# Altium PCB pcb_take2-1.PcbDoc (part 1 of 2)
Units mm, origin at the board's own origin, x right, y up, seen from the top; angles counter-clockwise.
Board outline 120 x 150 mm, 8 copper layers (Top Layer, Power plane, Mid-Layer 1, Mid-Layer 2, Mid-Layer 3, MidLayer4, GND plane, Bottom Layer); 174 components, 191 nets, 1036 pads, 8 vias.
Unrouted connection lines stored in the file: 235.
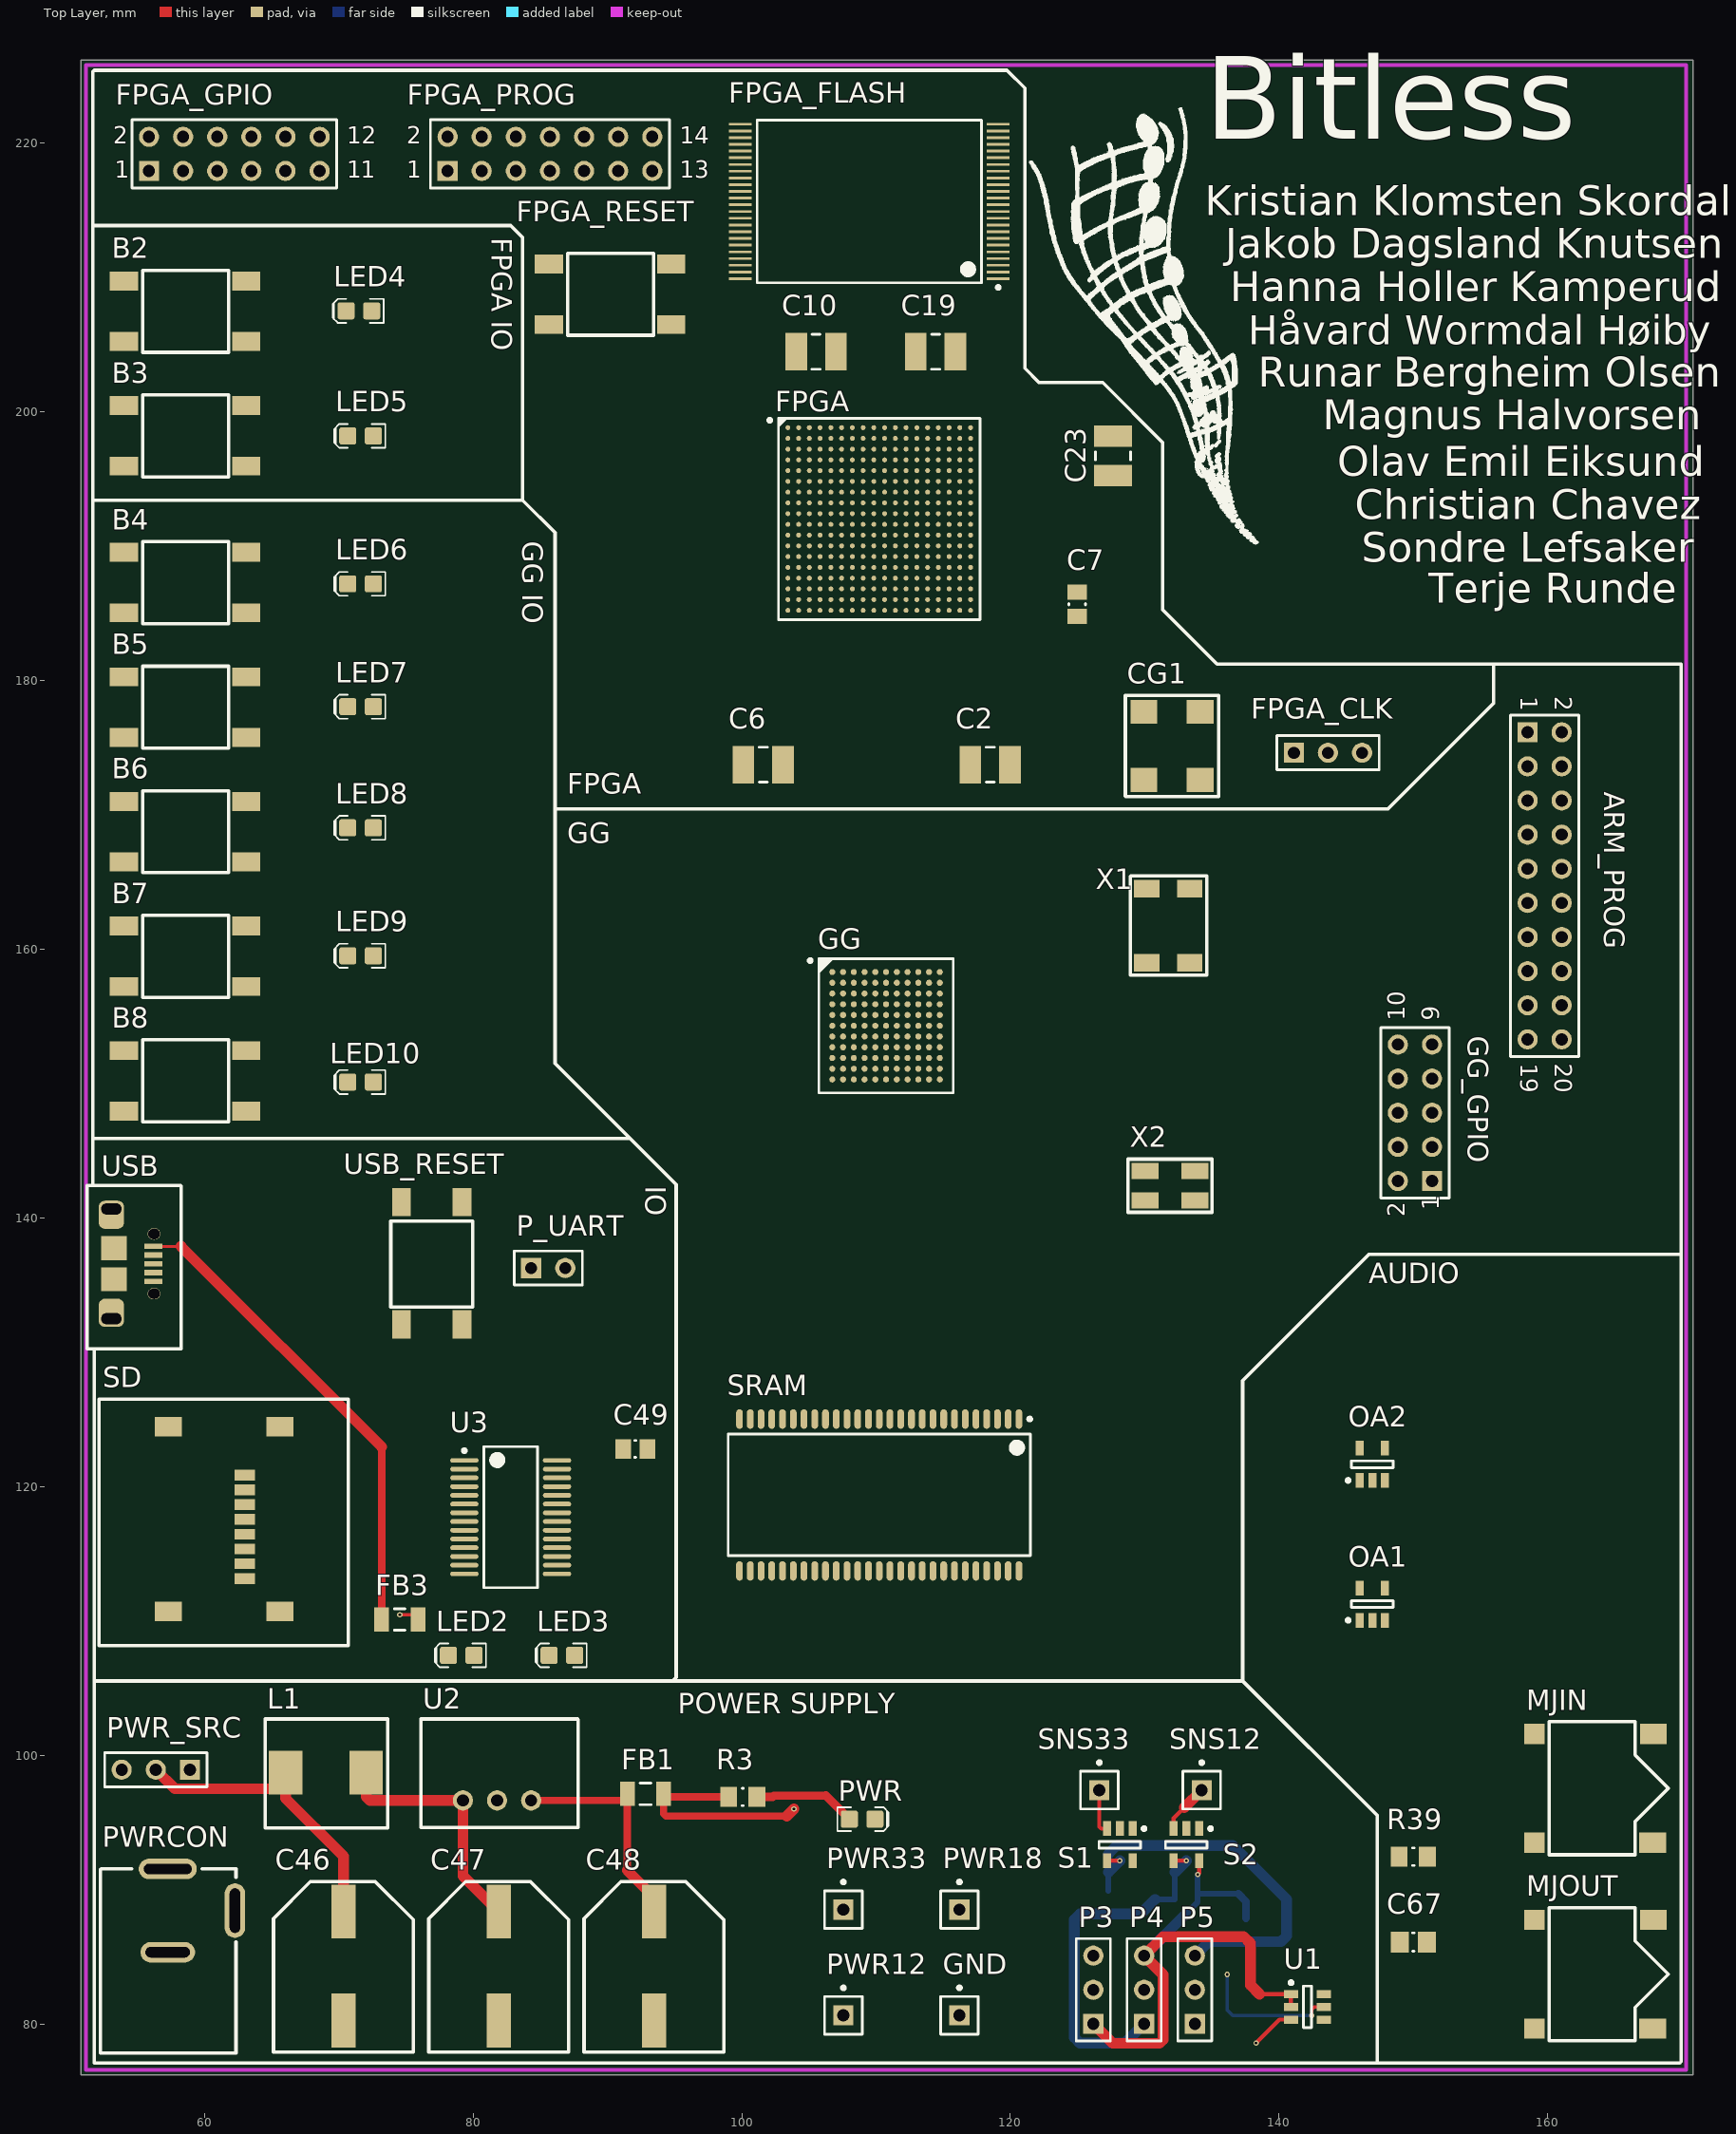
[diagram p0: Top Layer view]
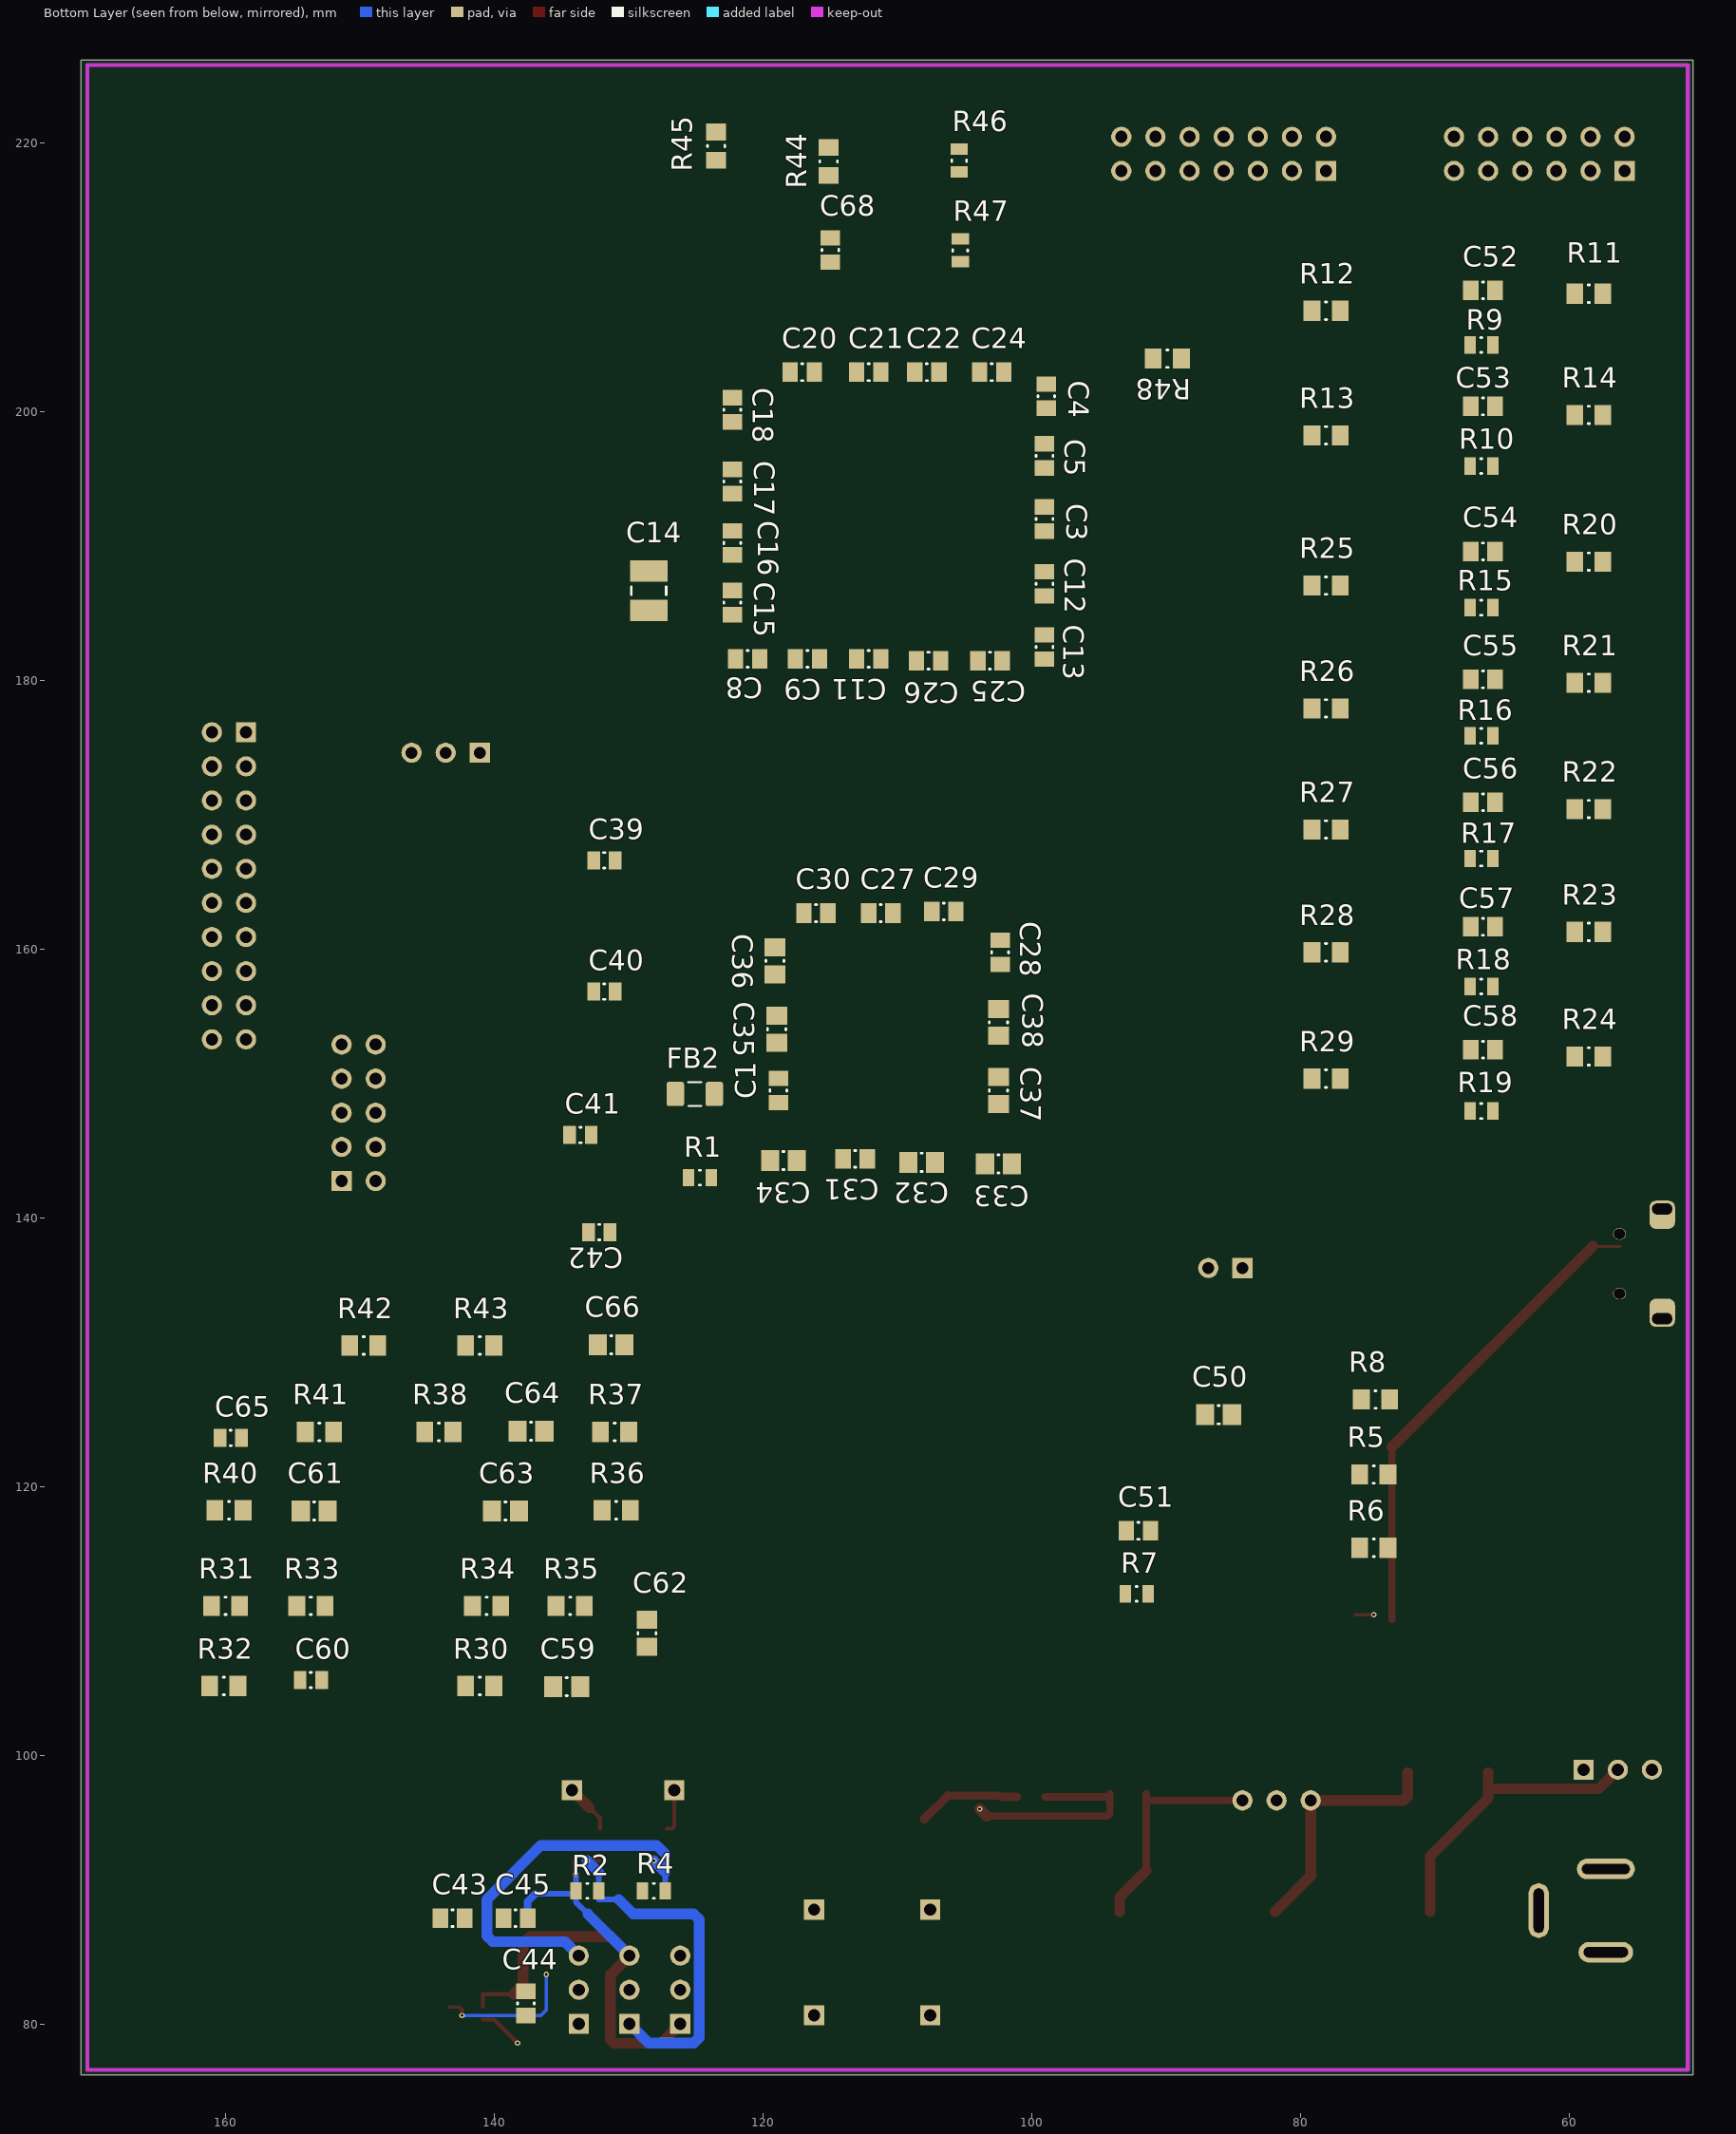
[diagram p1: Bottom Layer view, seen from below]
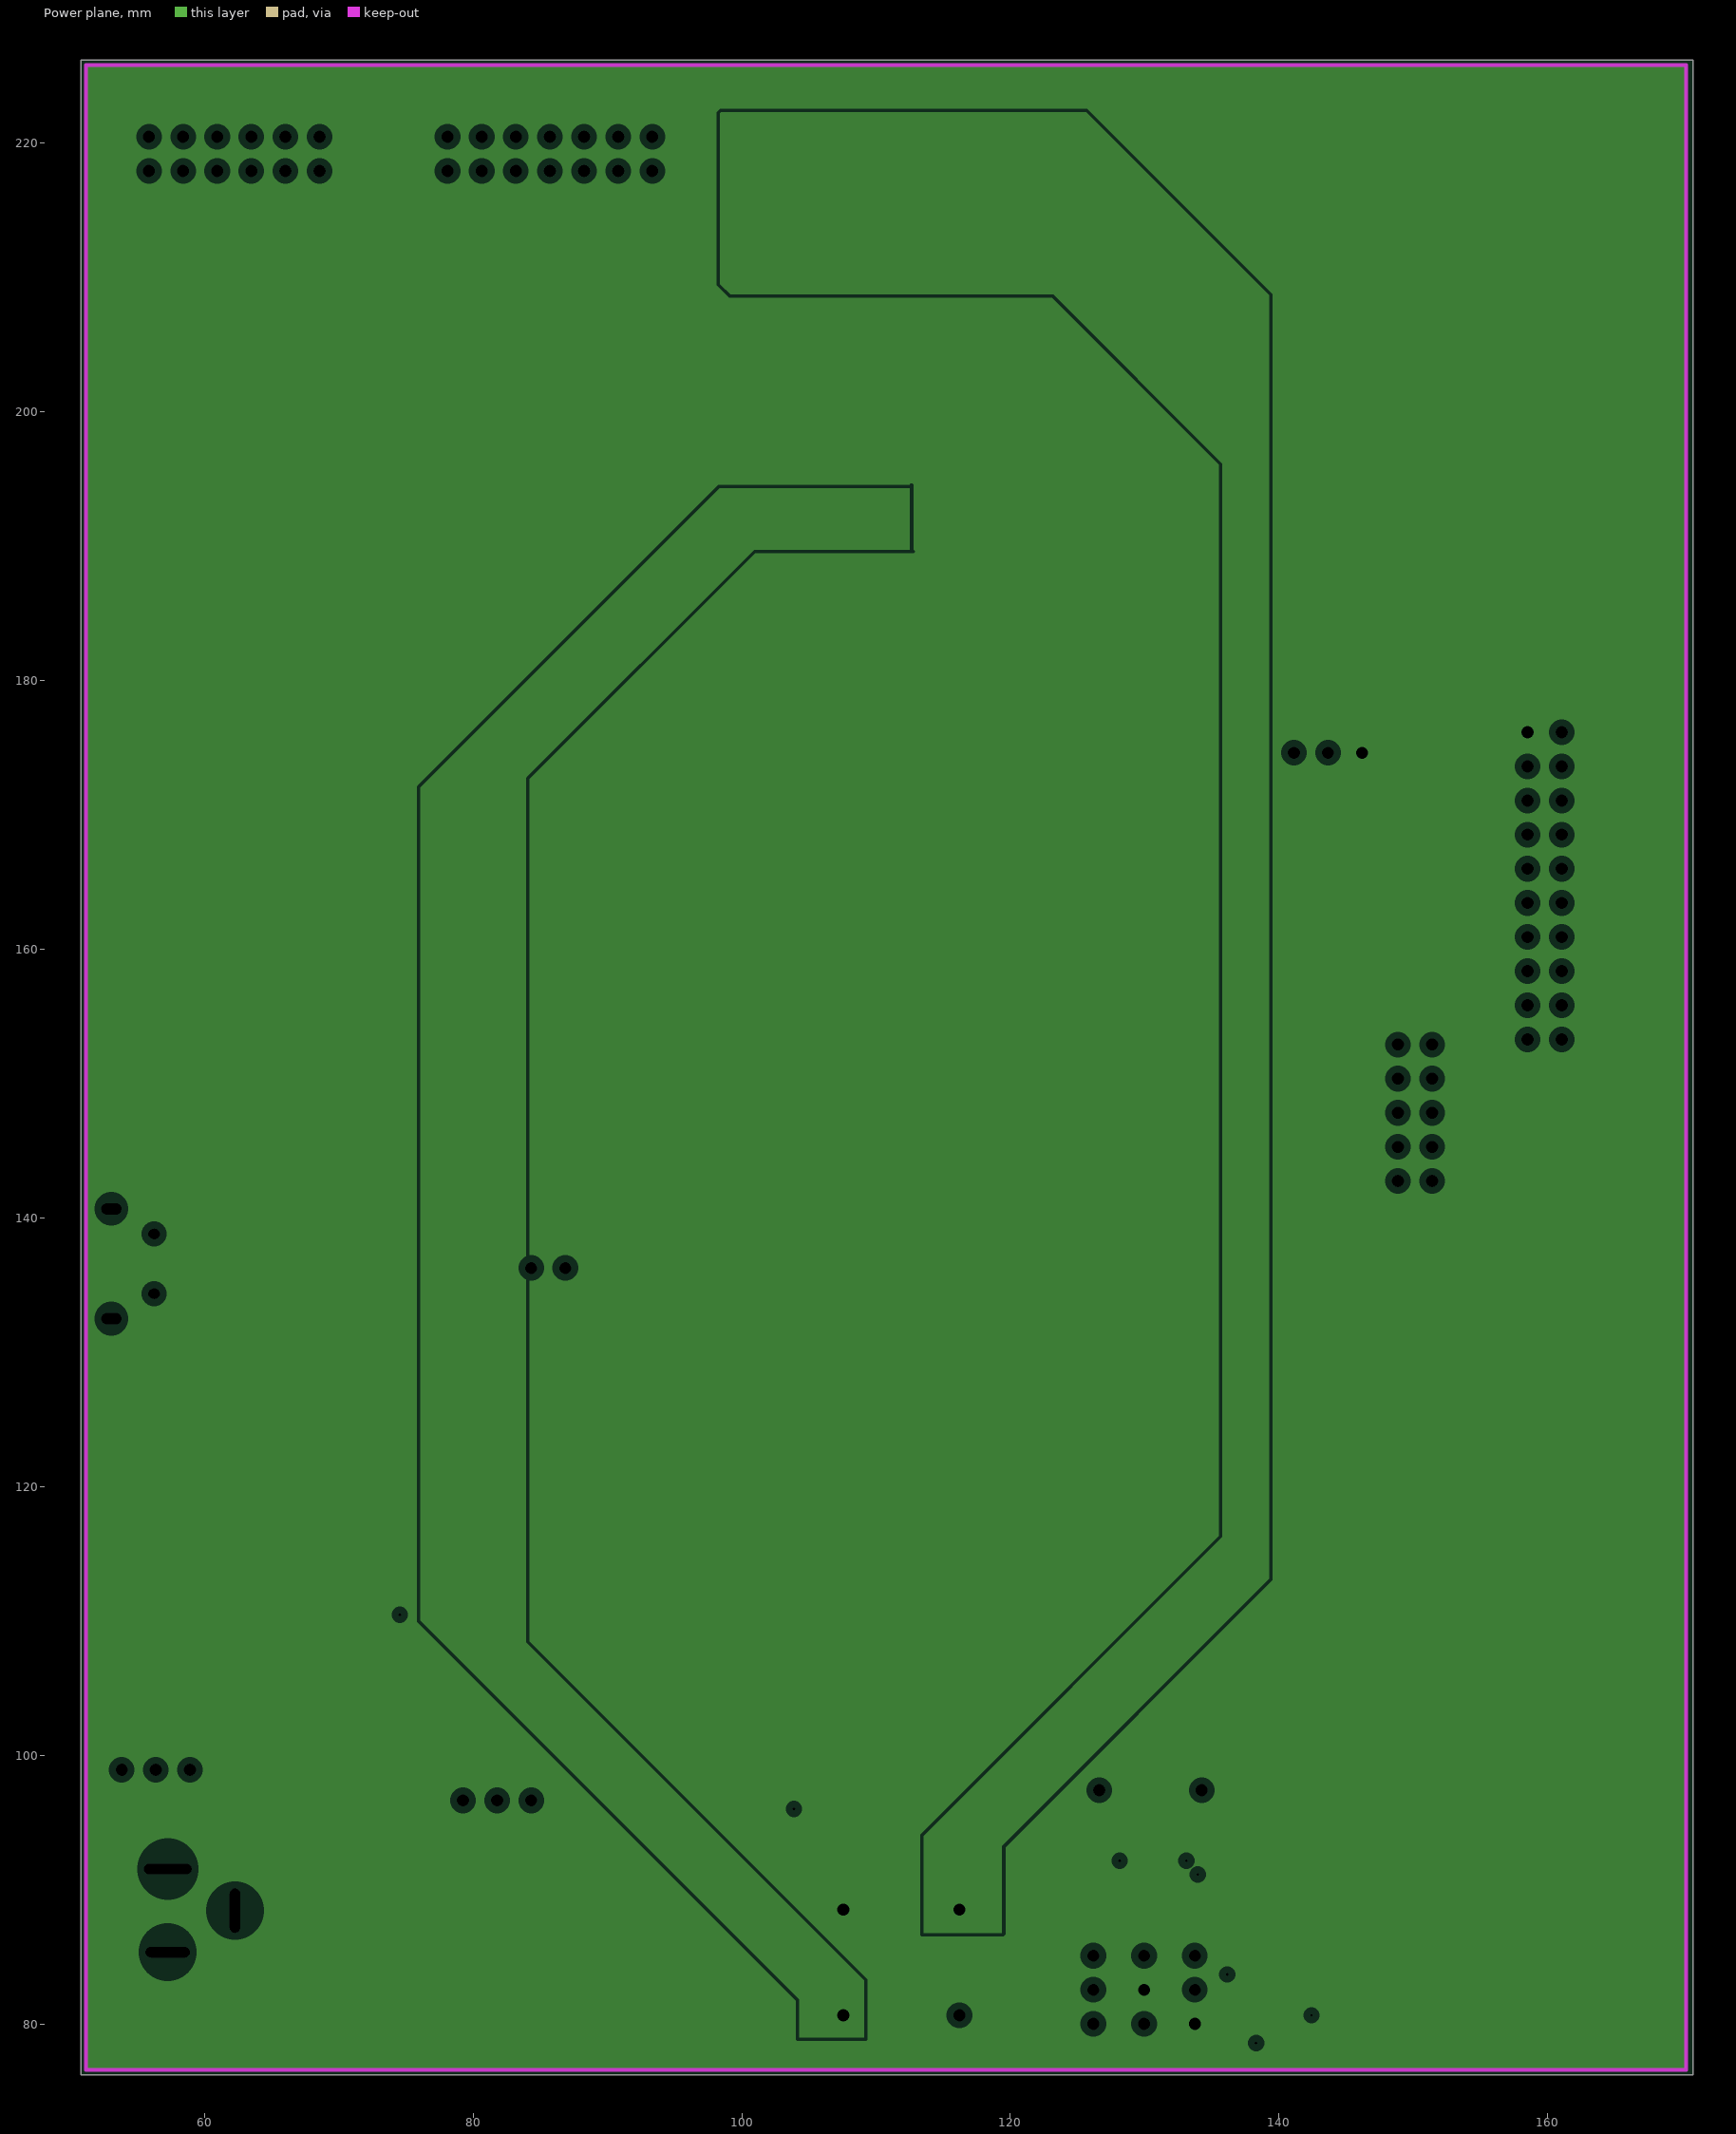
[diagram p2: Power plane, clearances drawn from the general rule]
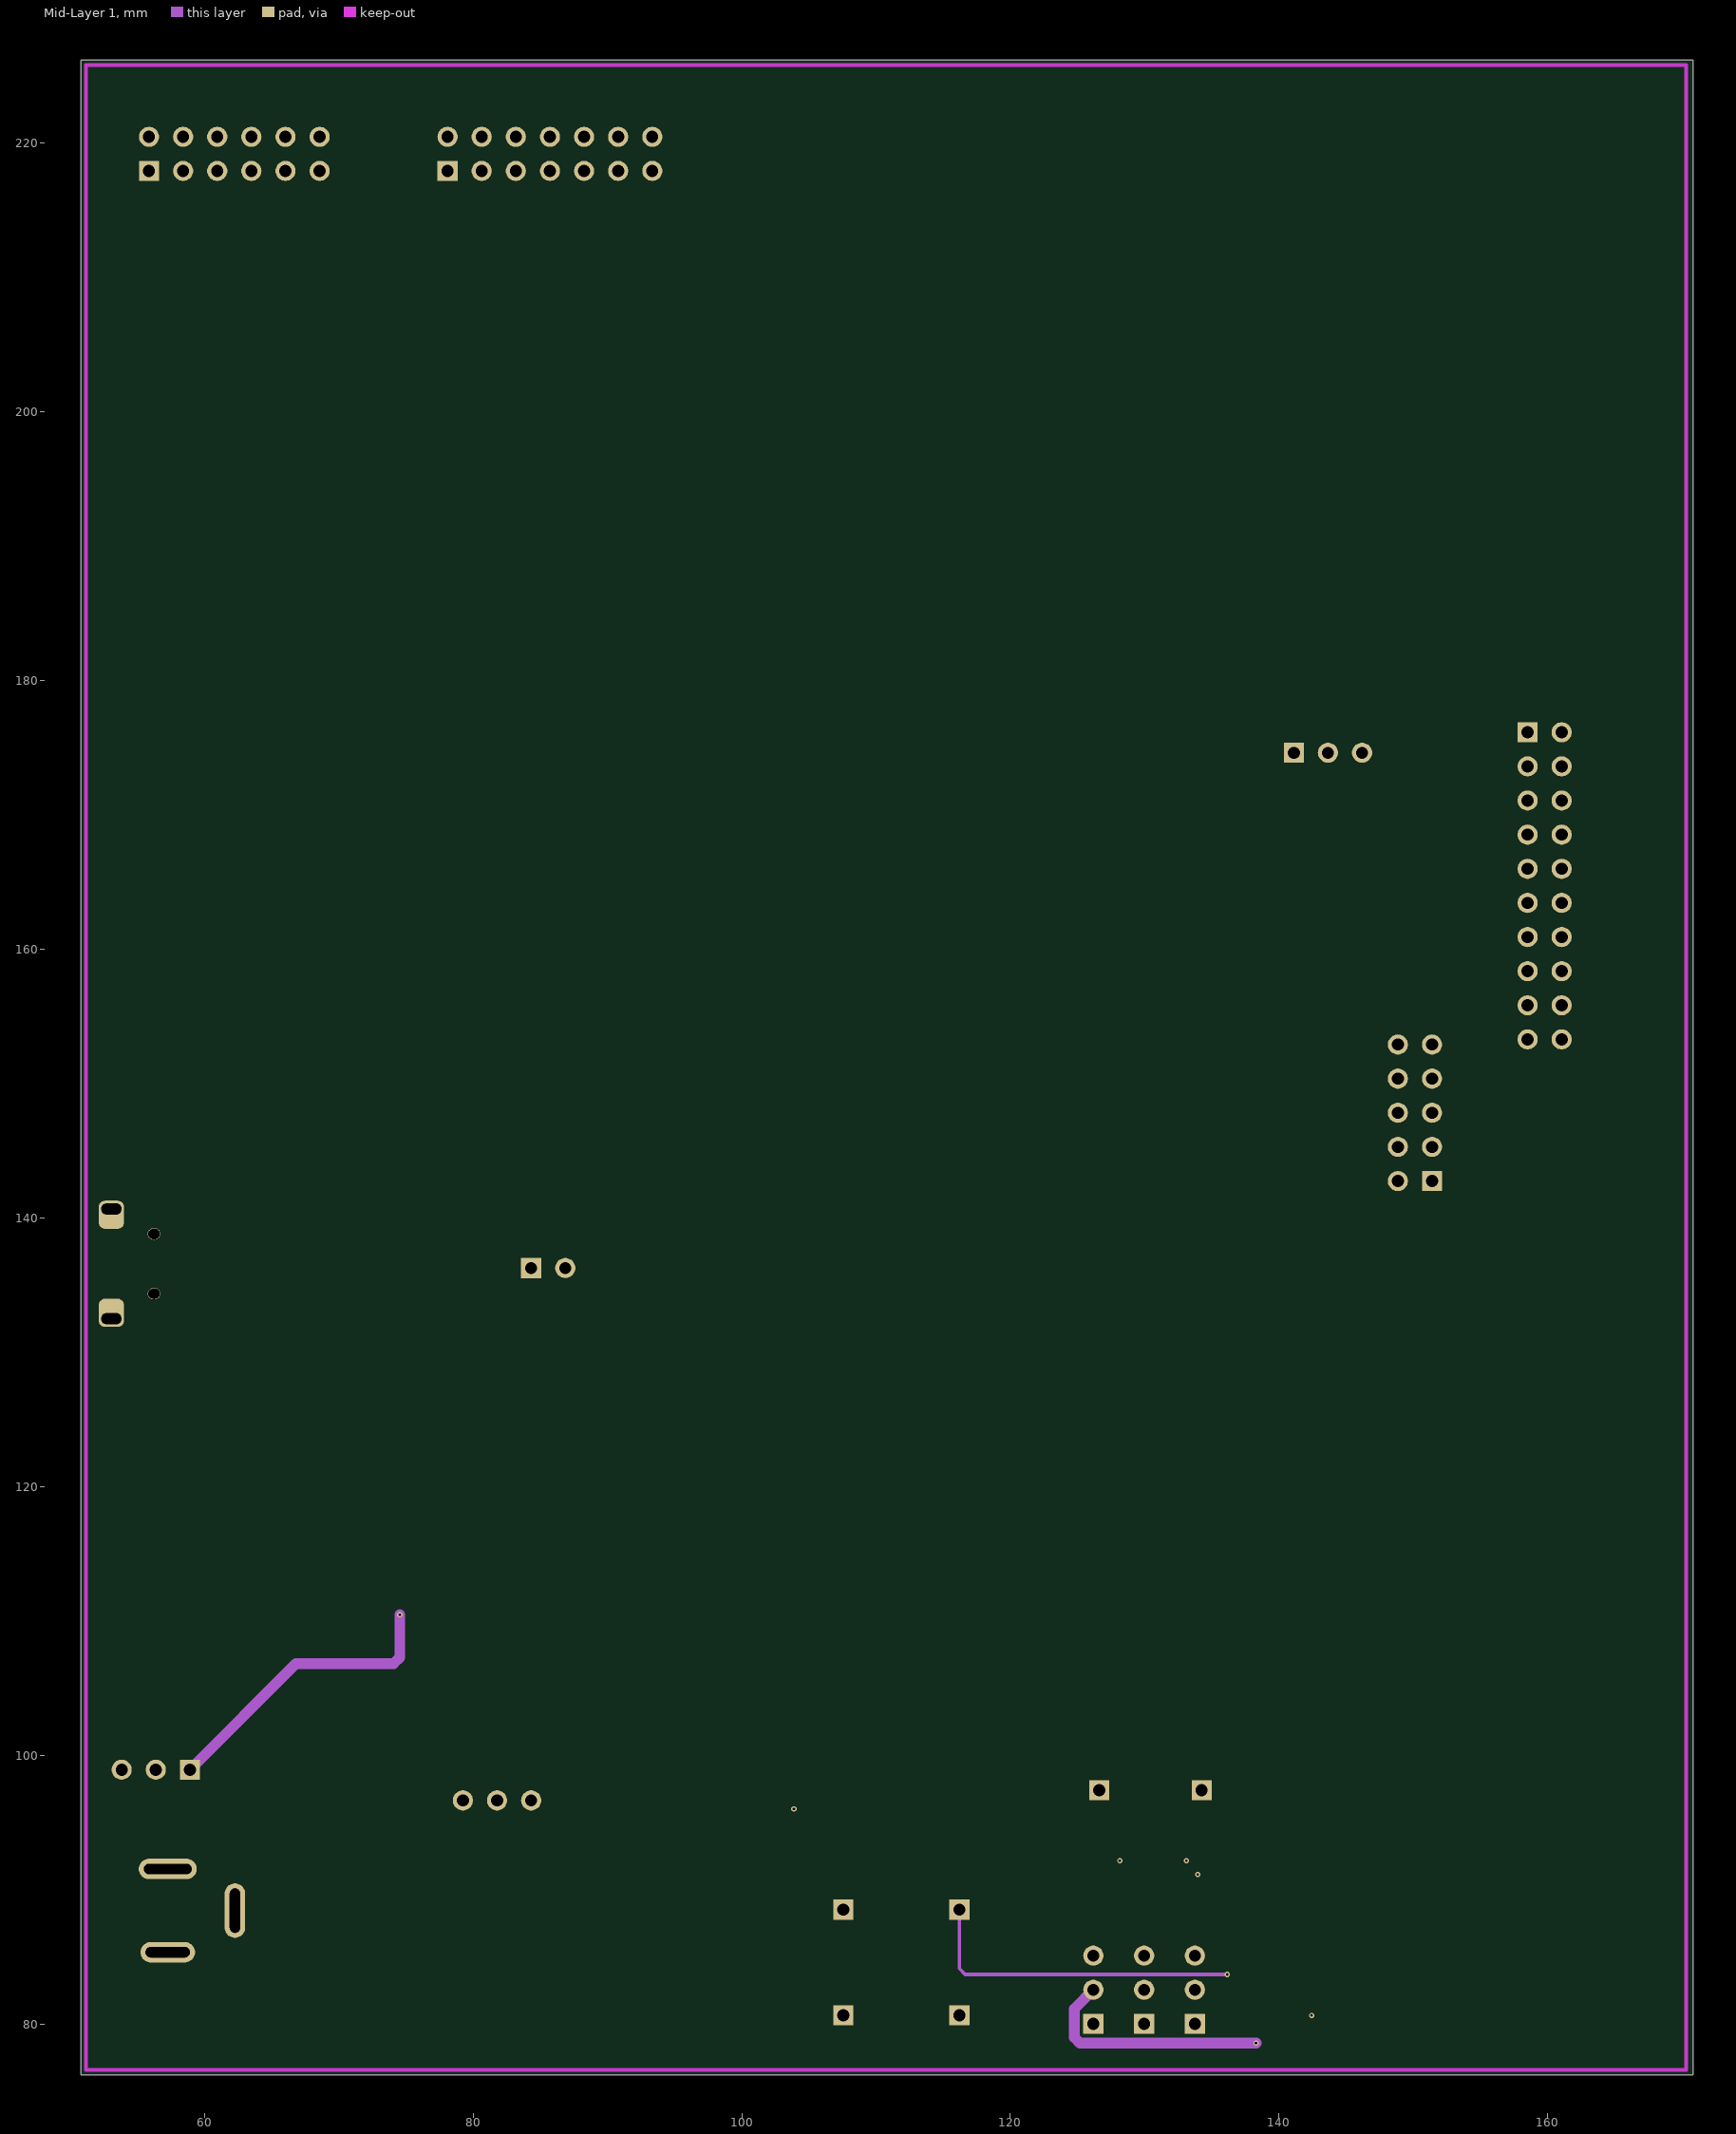
[diagram p3: Mid-Layer 1]
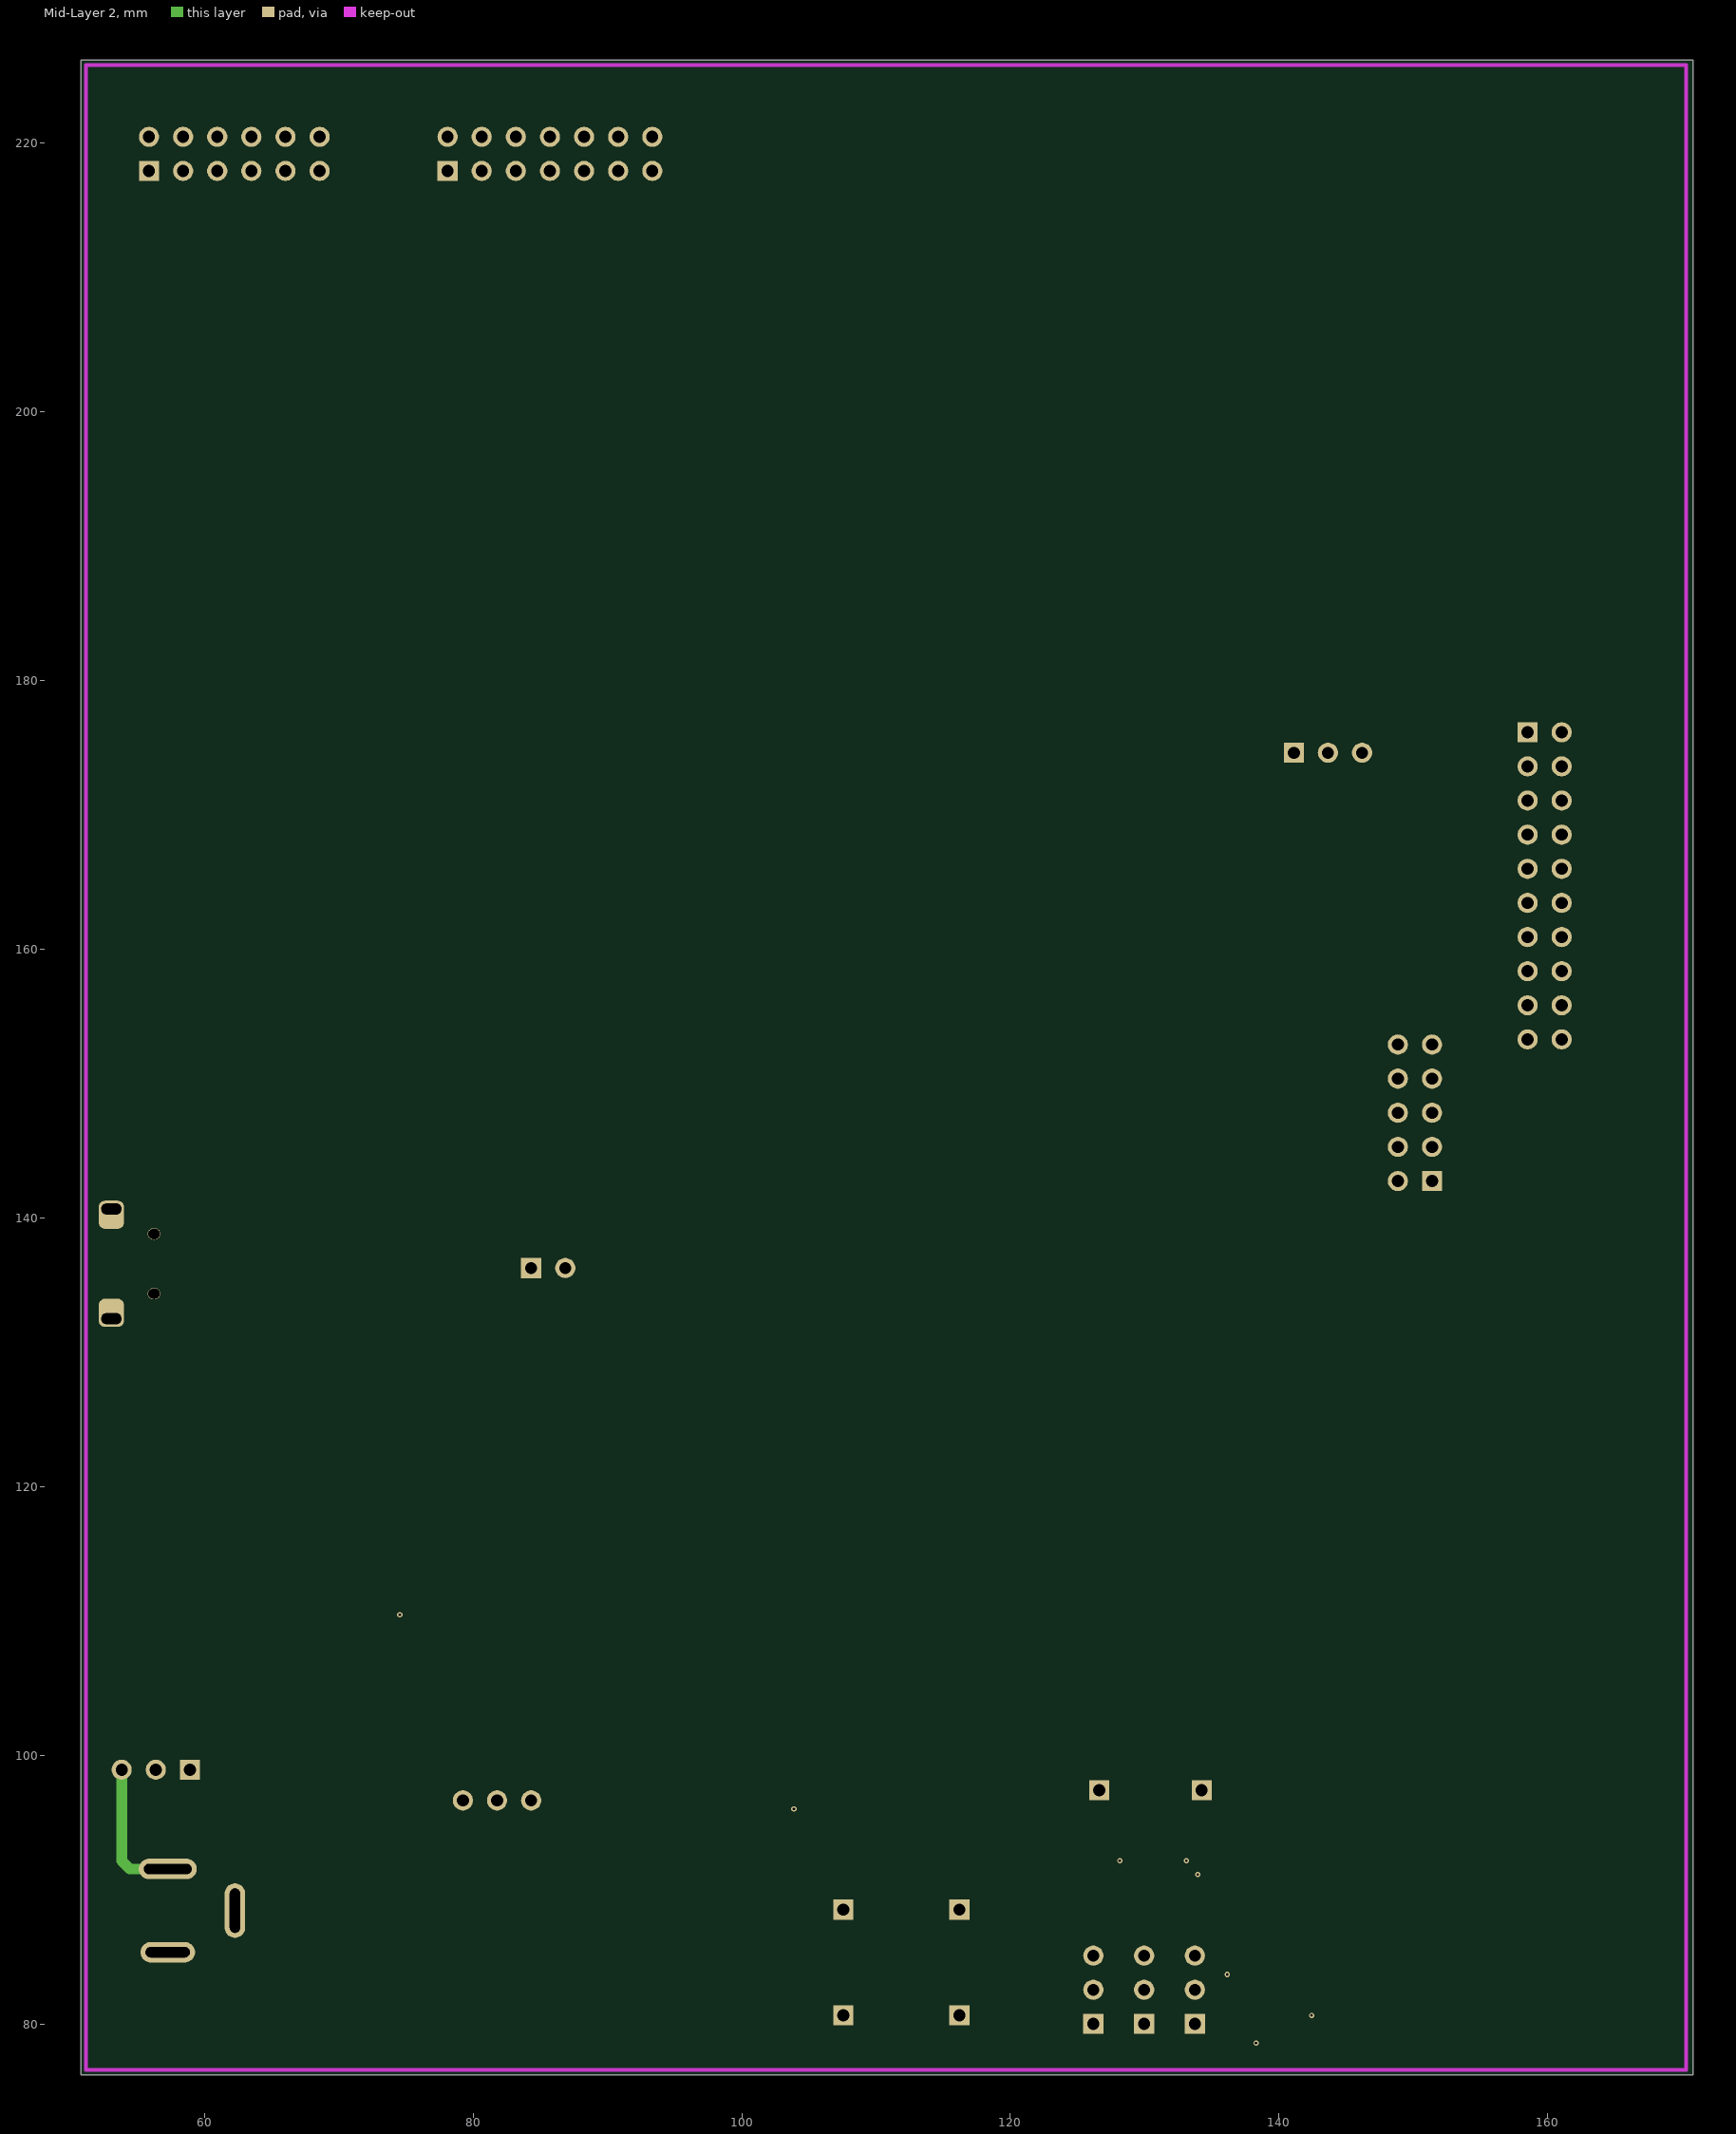
[diagram p4: Mid-Layer 2]
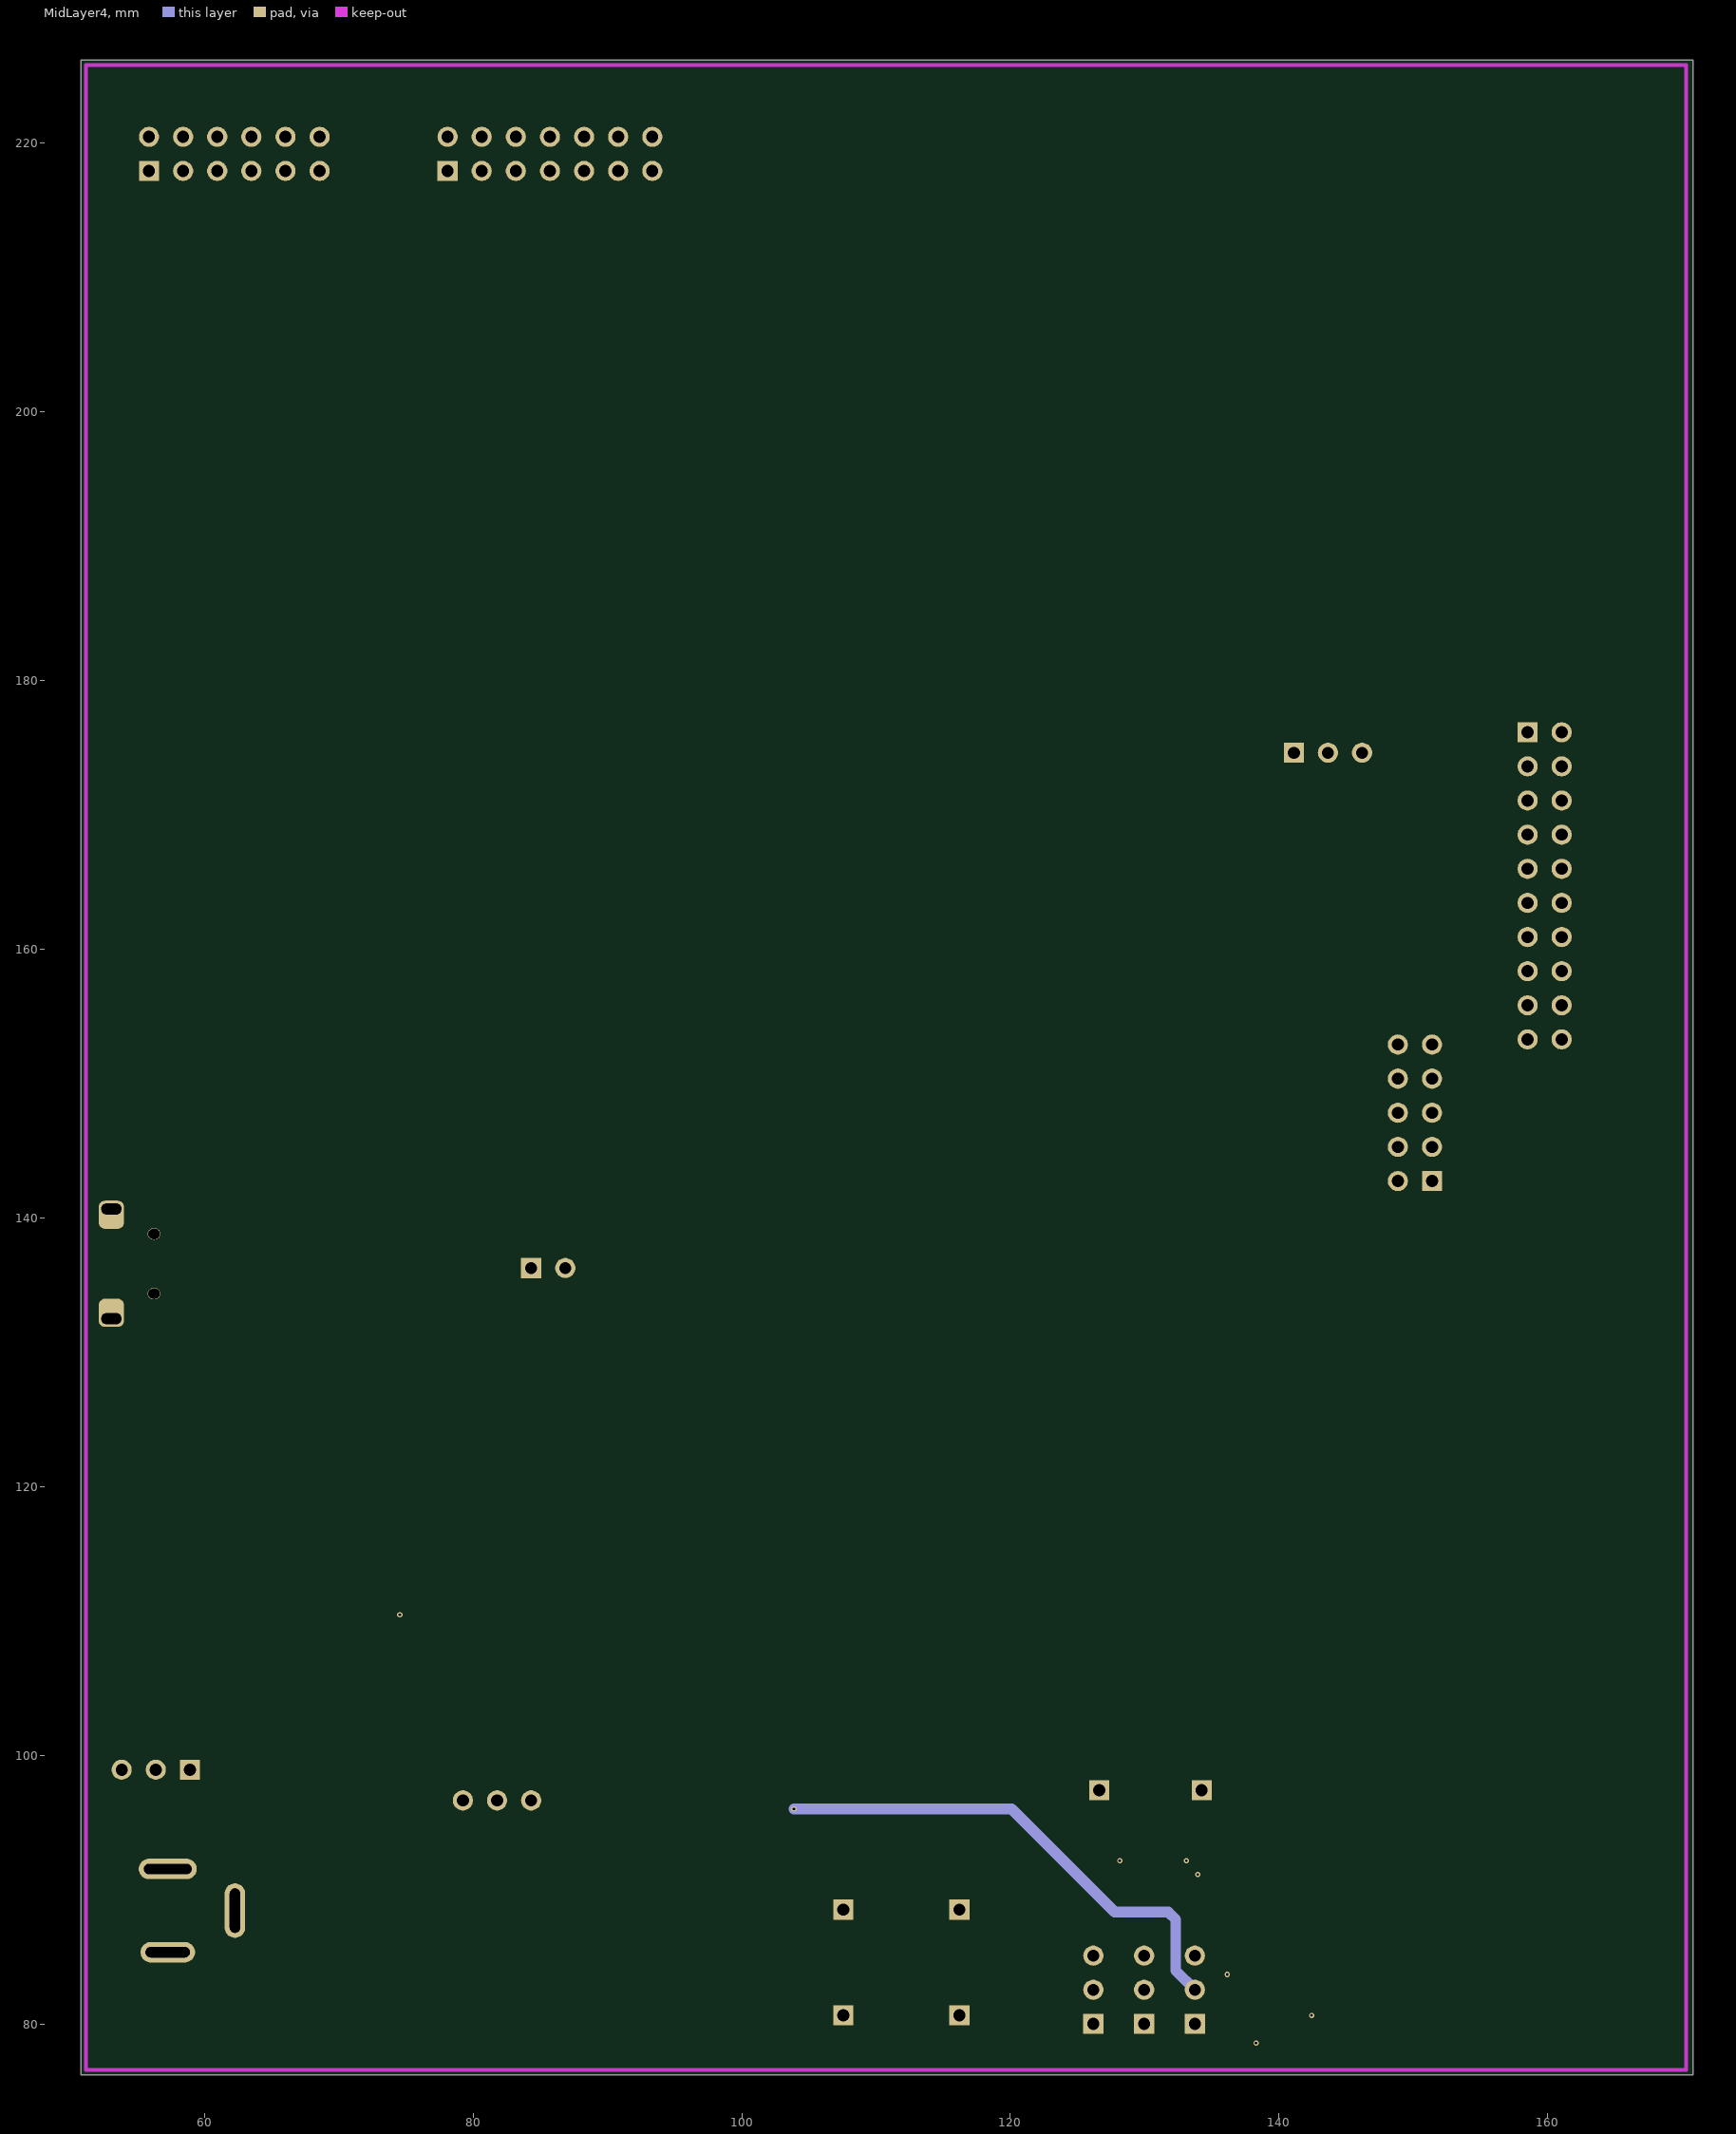
[diagram p5: MidLayer4]
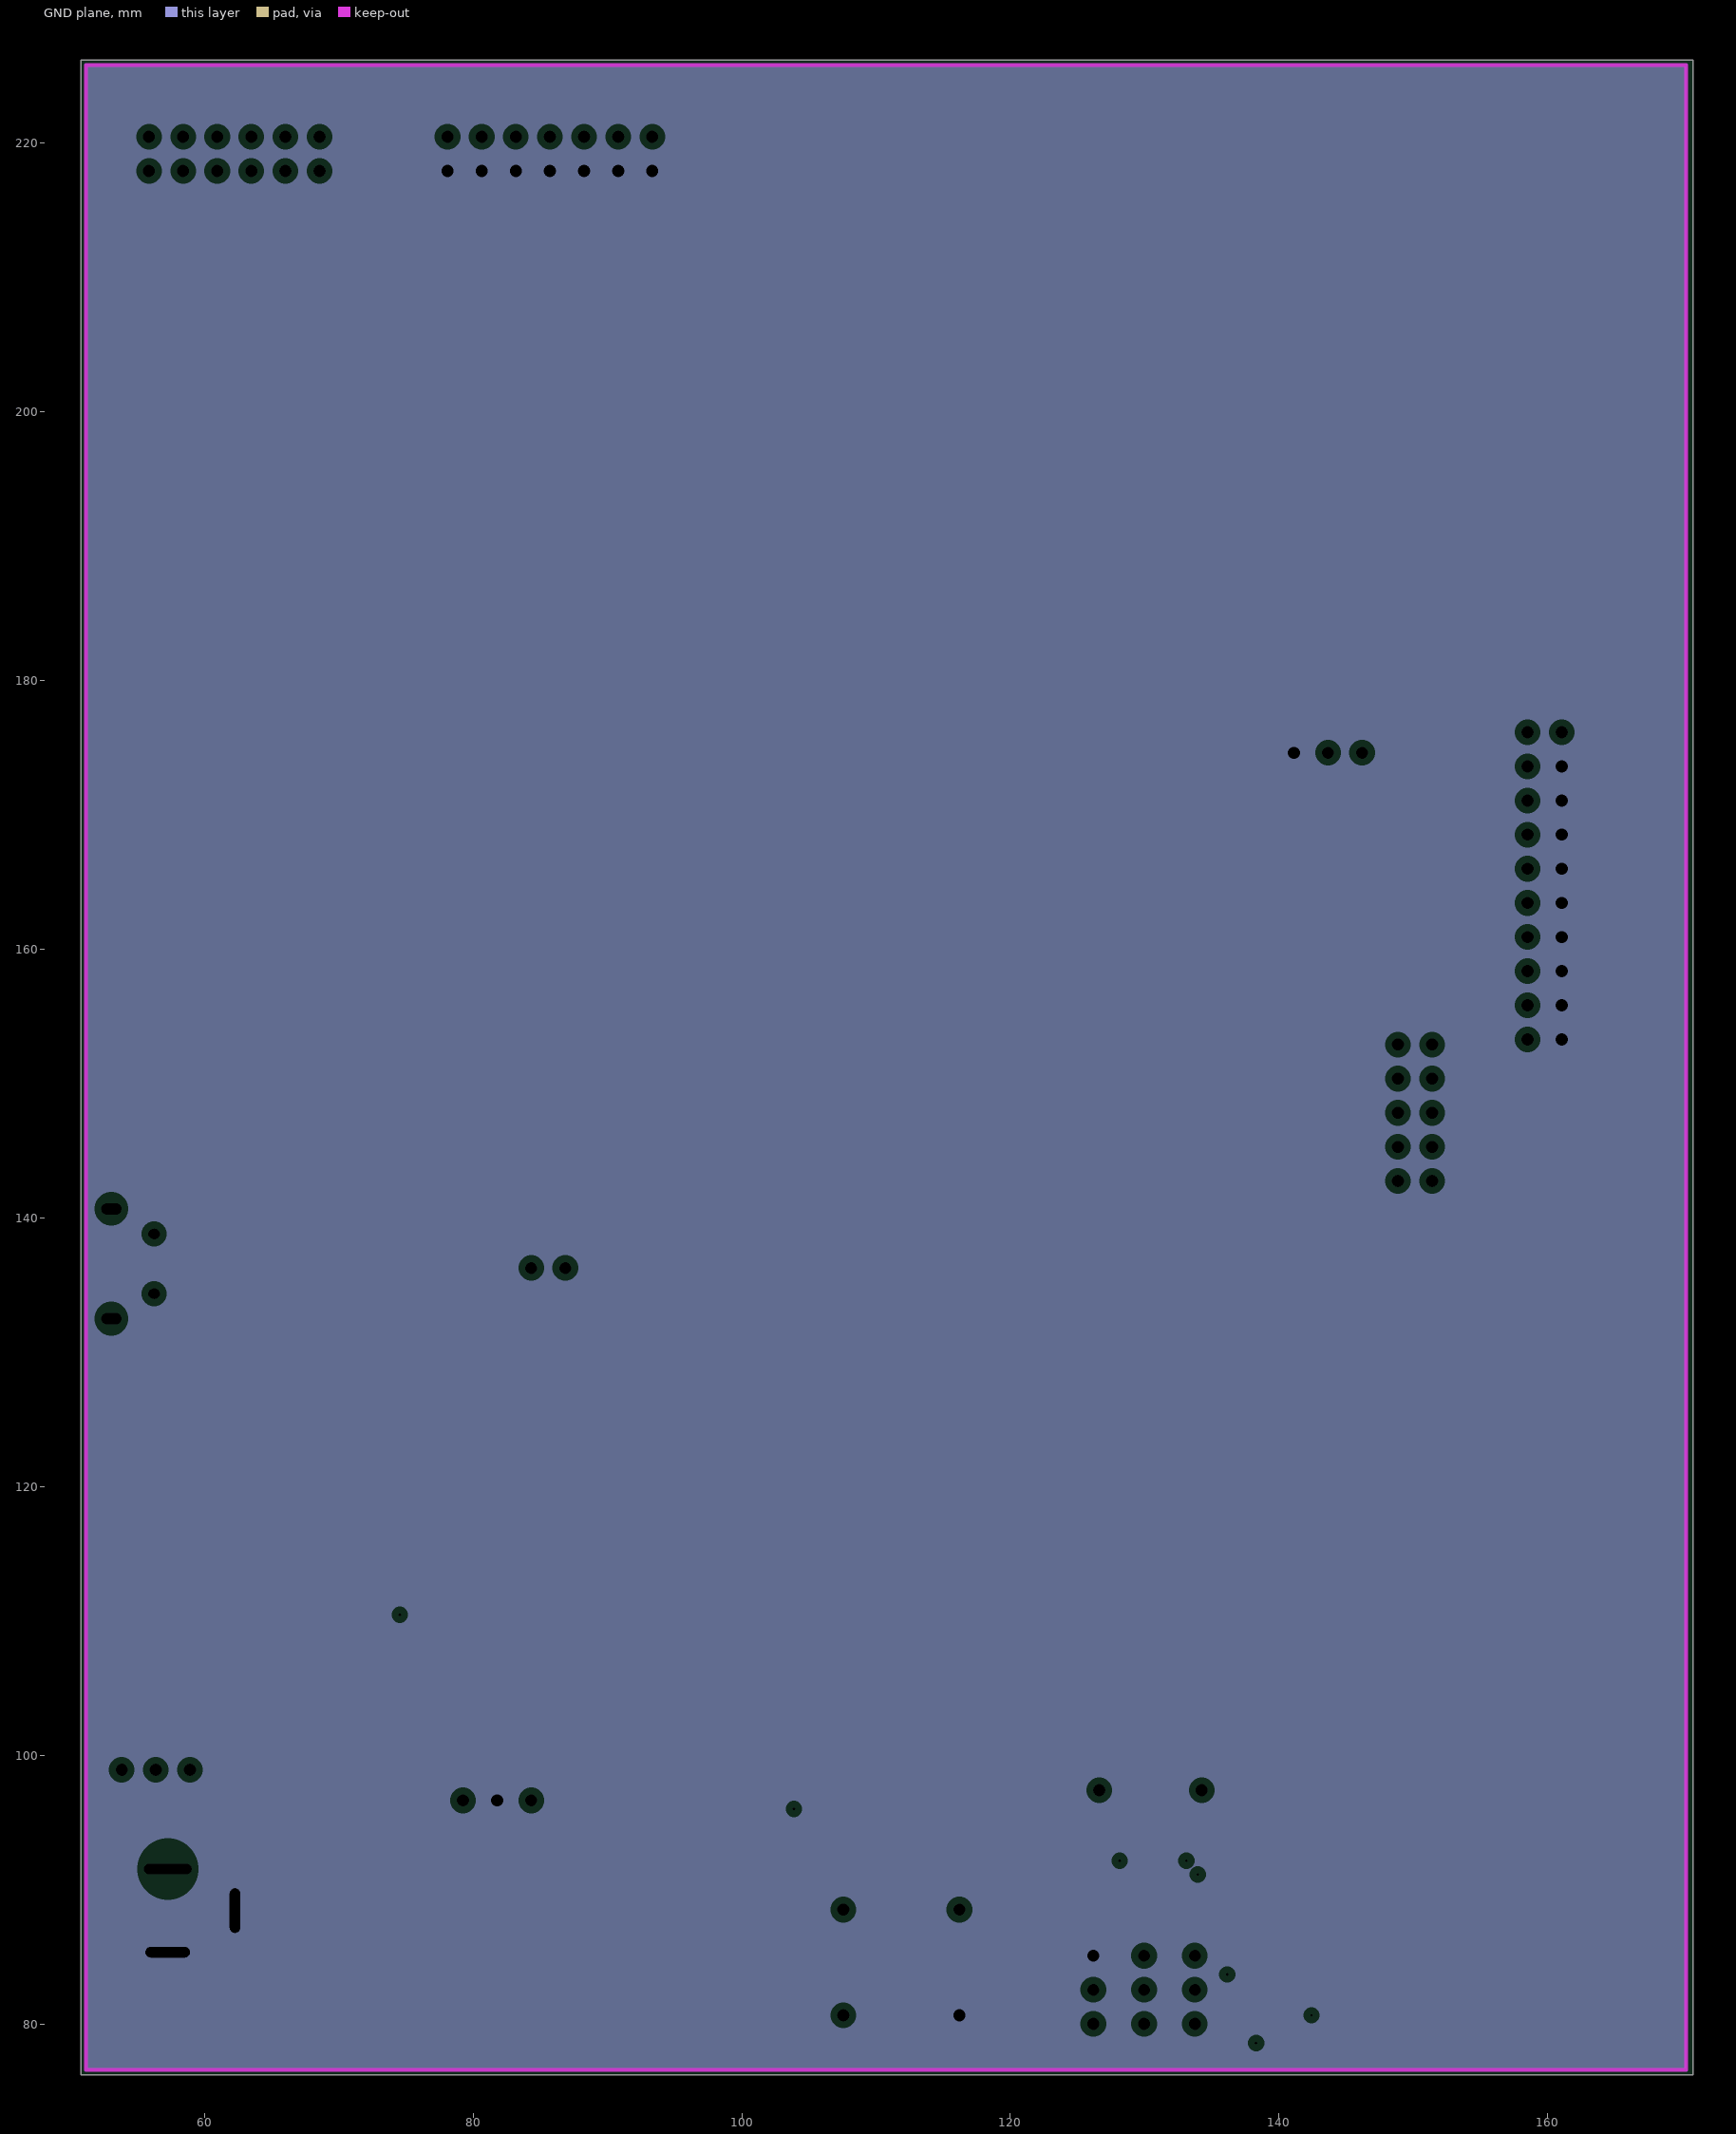
[diagram p6: GND plane, clearances drawn from the general rule]

## Layer stack, top to bottom
Top Layer: signal copper 0.0356
Dielectric: core 0.32, FR-4, Dk 4.8
Power plane: plane copper 0.0356, net (Multiple Nets)
Dielectric: prepreg 0.32, FR-4, Dk 4.8
Mid-Layer 1: signal copper 0.0356
Dielectric: core 0.32, FR-4, Dk 4.8
Mid-Layer 2: signal copper 0.0356
Dielectric: prepreg 0.32, FR-4, Dk 4.8
Mid-Layer 3: signal copper 0.0356
Dielectric: core 0.32, FR-4, Dk 4.8
MidLayer4: signal copper 0.0356
Dielectric: prepreg 0.32, FR-4, Dk 4.8
GND plane: plane copper 0.0356, net GND
Dielectric: core 0.32, FR-4, Dk 4.8
Bottom Layer: signal copper 0.0356

## Board outline
50.8,76.2 170.8,76.2 170.8,226.2 50.8,226.2

## Design rules (kind name [scope] priority, off if disabled: settings)
AssemblyTestPointUsage [All] p1 off:
Clearance FPGA_flash [InComponent('FPGA_FLASH')] p1: gap=0.049
Clearance BGA_clearance [IsTrack vs not isVia] p2: gap=0.254
Clearance [All] p3: gap=0.1
FabricationTestPointUsage [All] p1 off: valid=0 allowmultiple=FALSE
FabricationTestpoint [All] p1 off: side=3 testpointundercomponent=TRUE minsize=1.016 maxsize=2.54 preferedsize=1.524 minholesize=0 maxholesize=1.016 preferedholesize=0.813 testpointgrid=0.025 allowsidetop=TRUE allowsidebottom=TRUE usegrid=TRUE gridtolerance=0
HoleSize [All] p1: absolutevalues=TRUE maxlimit=4 minlimit=0.025 maxpercent=80.000 minpercent=20.000
MinimumSolderMaskSliver [All] p1: minsoldermaskwidth=0.046
PlaneClearance [All] p1: clearance=0.508
PlaneConnect [All] p1: planeconnectstyle=Relief reliefexpansion=0.508 reliefentries=4 reliefconductorwidth=0.254 reliefairgap=0.254
PolygonConnect [All] p1: connectstyle=Relief reliefconductorwidth=0.254 reliefentries=4 polygonreliefangle="90 Angle" airgapwidth=0.254
RoomDefinition U_power_supply [InComponentClass('U_power_supply')] p1: confinementstyle=ConfineIn formatcopy=TRUE lockcomponents=FALSE outline 51.816,77.343 145.161,77.343 145.161,103.124 51.816,103.124
RoutingVias [All] p1: holewidth=0.2 width=0.4 viastyle="Through Hole" minholewidth=0.2 minwidth=0.35 maxholewidth=1 maxwidth=4
SMDNeckDown [All] p1: percent=50.000
SilkToSolderMaskClearance [IsPad] p1: minsilkscreentomaskgap=0.1 clearancetoexposedcopper=TRUE
SolderMaskExpansion [All] p1: expansion=0.102
Width Width_powersupply [InComponentClass(U_power_supply)] p1 off: maxlimit=1.5 minlimit=0.5 preferedwidth=1
Width Width_power [InNet('VCC12') Or InNet('VCC18') Or InNet('VCC33') Or InNet('VCC_USB_SUPPLY')] p2: maxlimit=1 minlimit=0.2 preferedwidth=0.254
Width [All] p3: maxlimit=2 minlimit=0.1 preferedwidth=0.1
20 further rules are at their usual default settings.

## Classes and differential pairs
component class U_arm_power: C27 C28 C29 C30 C31 C32 C33 C34 C35 C36 C37 C38 FB2 R1
component class U_arm_sheet: ARM_PROG C1 GG
component class U_audio_interface: C59 C60 C61 C62 C63 C64 C65 C66 C67 MJIN MJOUT OA1 OA2 R30 R31 R32 R33 R34 R35 R36 R37 R38 R39 R40 R41 R42 R43
component class U_fpga_flash_debug: C68 FPGA_FLASH FPGA_PROG FPGA_RESET R44 R45 R46 R47 R48
component class U_fpga_power: C2 C3 C4 C5 C6 C7 C8 C9 C10 C11 C12 C13 C14 C15 C16 C17 C18 C19 C20 C21 C22 C23 C24 C25 C26
component class U_fpga_sheet: FPGA
component class U_oscillation: C39 C40 C41 C42 CG1 FPGA_CLK X1 X2
component class U_power_supply: C43 C44 C45 C46 C47 C48 FB1 GND L1 P3 P4 P5 PWR PWR12 PWR18 PWR33 PWR_SRC PWRCON R2 R3 R4 S1 S2 SNS12 SNS33 U1 U2
component class U_sram: SRAM
component class U_uart_usb_bridge: C49 C50 C51 FB3 LED2 LED3 P_UART R5 R6 R7 R8 U3 USB USB_RESET
component class U_user_interface: B2 B3 B4 B5 B6 B7 B8 C52 C53 C54 C55 C56 C57 C58 FPGA_GPIO GG_GPIO LED4 LED5 LED6 LED7 LED8 LED9 LED10 R9 R10 R11 R12 R13 R14 R15 R16 R17 R18 R19 R20 R21 R22 R23 R24 R25 R26 R27 R28 R29 SD
net class CTRL_BUS[2..0]: CTRL_BUS0 CTRL_BUS1 CTRL_BUS2
net class EBI_A[22..0]: EBI_A0 EBI_A1 EBI_A2 EBI_A3 EBI_A4 EBI_A5 EBI_A6 EBI_A7 EBI_A8 EBI_A9 EBI_A10 EBI_A11 EBI_A12 EBI_A13 EBI_A14 EBI_A15 EBI_A16 EBI_A17 EBI_A18 EBI_A19 EBI_A20 EBI_A21 EBI_A22
net class EBI_AD[15..0]: EBI_AD0 EBI_AD1 EBI_AD2 EBI_AD3 EBI_AD4 EBI_AD5 EBI_AD6 EBI_AD7 EBI_AD8 EBI_AD9 EBI_AD10 EBI_AD11 EBI_AD12 EBI_AD13 EBI_AD14 EBI_AD15
net class GPIO[21..0]: GPIO0 GPIO1 GPIO2 GPIO3 GPIO4 GPIO5 GPIO6 GPIO7 GPIO8 GPIO9 GPIO10 GPIO11 GPIO12 GPIO13 GPIO14 GPIO15 GPIO16 GPIO17 GPIO18 GPIO19 GPIO20 GPIO21
net class GPIO_FPGA[15..0]: GPIO_FPGA0 GPIO_FPGA1 GPIO_FPGA2 GPIO_FPGA3 GPIO_FPGA4 GPIO_FPGA5 GPIO_FPGA6 GPIO_FPGA7 GPIO_FPGA8 GPIO_FPGA9 GPIO_FPGA10 GPIO_FPGA11 GPIO_FPGA12 GPIO_FPGA13 GPIO_FPGA14 GPIO_FPGA15

## Components (designator, comment, footprint, x,y, rotation, side; value= is the part's Value field where it differs from the comment)
ARM_PROG "Header 10X2" HDR2X10 158.496,176.149 r270 top
B2 "BUTTON" BUTTON 63.119,205.232 r270 top
B3 "BUTTON" BUTTON 63.119,195.961 r270 top
B4 "BUTTON" BUTTON 63.119,185.039 r270 top
B5 "BUTTON" BUTTON 63.119,175.768 r270 top
B6 "BUTTON" BUTTON 63.119,166.497 r270 top
B7 "BUTTON" BUTTON 63.119,157.226 r270 top
B8 "BUTTON" BUTTON 63.119,147.955 r270 top
C1 "1uF" CAPC0805(2012)100_N 118.872,149.479 r270 bottom
C2 "100uF" CAPC1210(3225)280A_M 118.491,173.736 r0 top
C3 "4.7uF" CAPC0805(2012)145_N 99.06,192.024 r270 bottom
C4 "470nF" CAPC0805(2012)100_N 98.933,201.168 r270 bottom
C5 "470nF" CAPC0805(2012)100_N 99.06,196.723 r270 bottom
C6 "100uF" CAPC1210(3225)280A_M 101.6,173.736 r0 top
C7 "4.7uF" CAPC0805(2012)145_N 124.968,185.674 r90 top
C8 "470nF" CAPC0805(2012)100_N 121.158,181.61 r0 bottom
C9 "470nF" CAPC0805(2012)100_N 116.713,181.61 r180 bottom
C10 "100uF" CAPC1210(3225)280A_M 105.537,204.47 r180 top
C11 "4.7uF" CAPC0805(2012)145_N 112.141,181.61 r0 bottom
C12 "470nF" CAPC0805(2012)100_N 99.06,187.198 r90 bottom
C13 "470nF" CAPC0805(2012)100_N 99.06,182.499 r270 bottom
C14 "100uF" CAPC1210(3225)280A_M 128.524,186.69 r90 bottom
C15 "4.7uF" CAPC0805(2012)145_N 122.301,185.801 r90 bottom
C16 "470nF" CAPC0805(2012)100_N 122.301,190.246 r270 bottom
C17 "470nF" CAPC0805(2012)100_N 122.301,194.818 r90 bottom
C18 "470nF" CAPC0805(2012)100_N 122.301,200.152 r270 bottom
C19 "100uF" CAPC1210(3225)280A_M 114.427,204.47 r0 top
C20 "4.7uF" CAPC0805(2012)145_N 117.094,202.946 r180 bottom
C21 "470nF" CAPC0805(2012)100_N 112.141,202.946 r180 bottom
C22 "470nF" CAPC0805(2012)100_N 107.823,202.946 r180 bottom
C23 "100uF" CAPC1210(3225)280A_M 127.635,196.723 r90 top
C24 "4.7uF" CAPC0805(2012)145_N 102.997,202.946 r0 bottom
C25 "470nF" CAPC0805(2012)100_N 103.124,181.483 r0 bottom
C26 "470nF" CAPC0805(2012)100_N 107.696,181.483 r180 bottom
C27 "10uF" CAPC0805(2012)145_N 111.252,162.687 r180 bottom
C28 "10nF" CAPC0805(2012)75_N 102.362,159.766 r90 bottom
C29 "10nF" CAPC0805(2012)75_N 106.553,162.814 r180 bottom
C30 "10nF" CAPC0805(2012)75_N 116.078,162.687 r0 bottom
C31 "10uF" CAPC0805(2012)145_N 113.157,144.399 r0 bottom
C32 "100nF" CAPC0805(2012)100_M 108.204,144.145 r0 bottom
C33 "100nF" CAPC0805(2012)100_M 102.489,144.018 r180 bottom
C34 "100nF" CAPC0805(2012)100_M 118.491,144.272 r180 bottom
C35 "100nF" CAPC0805(2012)100_M 118.999,154.051 r90 bottom
C36 "100nF" CAPC0805(2012)100_M 119.126,159.131 r90 bottom
C37 "100nF" CAPC0805(2012)100_M 102.489,149.479 r270 bottom
C38 "100nF" CAPC0805(2012)100_M 102.489,154.559 r270 bottom
C39 "22pF" CAPC0805(2012)75_L 131.826,166.624 r0 bottom
C40 "22pF" CAPC0805(2012)75_L 131.826,156.845 r0 bottom
C41 "33pF" CAPC0805(2012)75_L 133.604,146.177 r180 bottom
C42 "33pF" CAPC0805(2012)75_L 132.207,138.938 r0 bottom
C43 "1uF" CAPC0805(2012)100_N 143.129,87.884 r180 bottom
C44 "1uF" CAPC0805(2012)100_N 137.668,81.534 r270 bottom
C45 "1uF" CAPC0805(2012)100_N 138.43,87.884 r0 bottom
C46 "Cap Pol2" CAP470uF 70.358,80.264 r0 top
C47 "Cap Pol2" CAP470uF 81.915,80.264 r0 top
C48 "Cap Pol2" CAP470uF 93.472,80.264 r0 top
C49 "10nF" CAPC0805(2012)75_N 92.075,122.809 r0 top
C50 "100nF" CAPC0805(2012)100_M 86.106,125.349 r180 bottom
C51 "10nF" CAPC0805(2012)75_N 92.075,116.713 r180 bottom
C52 "10nF" CAPC0805(2012)75_N 66.421,209.042 r180 bottom
C53 "10nF" CAPC0805(2012)75_N 66.421,200.406 r180 bottom
C54 "10nF" CAPC0805(2012)75_N 66.421,189.611 r0 bottom
C55 "10nF" CAPC0805(2012)75_N 66.421,180.086 r0 bottom
C56 "10nF" CAPC0805(2012)75_N 66.421,170.942 r0 bottom
C57 "10nF" CAPC0805(2012)75_N 66.421,161.671 r0 bottom
C58 "10nF" CAPC0805(2012)75_N 66.421,152.527 r0 bottom
C59 "150pF" CAPC0805(2012)75_M 134.62,105.106 r0 bottom
C60 "10uF" CAPC0805(2012)145_L 153.67,105.606 r0 bottom
C61 "680pF" CAPC0805(2012)100_M 153.416,118.187 r0 bottom
C62 "10nF" CAPC0805(2012)100_M 128.651,109.093 r270 bottom
C63 "100nF" CAPC0805(2012)100_M 139.192,118.187 r0 bottom
C64 "150pF" CAPC0805(2012)75_M 137.287,124.129 r180 bottom
C65 "10uF" CAPC0805(2012)145_L 159.639,123.629 r0 bottom
C66 "10nF" CAPC0805(2012)100_M 131.318,130.556 r180 bottom
C67 "680pF" CAPC0805(2012)100_M 149.987,86.106 r180 top
C68 "10nF" CAPC0805(2012)75_N 115,212.05 r90 bottom
CG1 "TXC-7W" TXC-7W 129.929,177.673 r270 top
FB1 "Inductor" INDC3216 92.837,97.126 r0 top
FB2 "BLM21B102S or similar" RESC3216N 125.095,149.225 r0 bottom
FB3 "Inductor" INDC3216 74.549,110.109 r0 top
FPGA "XC6SLX45-2CSG324I" CSG324 110.236,192.024 r0 top
FPGA_CLK "Header 3" HDR1X3 141.097,174.625 r0 top
FPGA_FLASH "XCF16PVOG48C" FPGA_FLASH 109.495,215.66 r180 top
FPGA_GPIO "Header 6X2" HDR2X6 55.88,217.932 r0 top
FPGA_PROG "Header 7X2" HDR2X7 78.105,217.932 r0 top
FPGA_RESET "BUTTON" BUTTON 94.742,206.502 r270 top
GG "EFM32GG990F1024-BGA112" ENMR-BGA112 110.744,154.305 r0 top
GG_GPIO "Header 5X2" HDR2X5 151.384,142.748 r90 top
GND "Socket" PIN1 116.205,80.645 r0 top
L1 "Inductor" "Coil DRA74-6R8-R" 66.04,98.707 r0 top
LED2 "Red" LED-0805-A 79.121,107.442 r180 top
LED3 "Red" LED-0805-A 86.614,107.442 r180 top
LED4 "Green" LED-0805-K 71.501,207.518 r180 top
LED5 "Green" LED-0805-K 71.628,198.211 r180 top
LED6 "Green" LED-0805-K 71.628,187.198 r180 top
LED7 "Green" LED-0805-K 71.628,178.054 r180 top
LED8 "Green" LED-0805-K 71.628,169.037 r180 top
LED9 "Green" LED-0805-K 71.628,159.512 r180 top
LED10 "Green" LED-0805-K 71.628,150.114 r180 top
MJIN "Minijack" MINIJACKS 159.004,101.6 r270 top
MJOUT "Minijack" MINIJACKS 159.004,87.757 r270 top
OA1 "TLV2471IDBVT" TLV2471IDBVT 146.939,111.252 r90 top
OA2 "TLV2471IDBVT" TLV2471IDBVT 146.939,121.666 r90 top
P3 "Header 3" HDR1X3 126.174,80.01 r90 top
P4 "Header 3" HDR1X3 129.953,80.01 r90 top
P5 "Header 3" HDR1X3 133.731,80.01 r90 top
P_UART "Header 2" HDR1X2 84.328,136.271 r0 top
PWR "Green" LED-0805-K 108.966,95.25 r0 top
PWR12 "Socket" PIN1 107.569,80.645 r0 top
PWR18 "Socket" PIN1 116.205,88.519 r0 top
PWR33 "Socket" PIN1 107.569,88.519 r0 top
PWR_SRC "Header 3" HDR1X3 58.928,98.933 r180 top
PWRCON "DC10B" DC-10B 57.277,85.344 r90 top
R1 "1.00 Ohm" RESC0805(2012)_L 124.714,143.002 r180 bottom
R2 "10R 5% 0805(2012)" RESC0805(2012)_L 133.096,89.916 r180 bottom
R3 "330.00 Ohm" RESC0805(2012)_M 100.076,96.901 r180 top
R4 "10R 5% 0805(2012)" RESC0805(2012)_L 128.143,89.916 r0 bottom
R5 "330.00 Ohm" RESC0805(2012)_M 74.549,120.904 r0 bottom
R6 "330.00 Ohm" RESC0805(2012)_M 74.549,115.443 r0 bottom
R7 "100K" RESC0805(2012)_L 92.202,112.014 r0 bottom
R8 "100.00 Ohm" RESC0805(2012)_M 74.422,126.492 r180 bottom
R9 "100K" RESC0805(2012)_L 66.548,204.978 r180 bottom
R10 "100K" RESC0805(2012)_L 66.548,195.961 r180 bottom
R11 "100.00 Ohm" RESC0805(2012)_M 58.547,208.788 r0 bottom
R12 "330.00 Ohm" RESC0805(2012)_M 78.105,207.518 r180 bottom
R13 "330.00 Ohm" RESC0805(2012)_M 78.105,198.247 r180 bottom
R14 "100.00 Ohm" RESC0805(2012)_M 58.547,199.771 r0 bottom
R15 "100K" RESC0805(2012)_L 66.548,185.42 r0 bottom
R16 "100K" RESC0805(2012)_L 66.548,175.895 r0 bottom
R17 "100K" RESC0805(2012)_L 66.548,166.751 r0 bottom
R18 "100K" RESC0805(2012)_L 66.548,157.226 r0 bottom
R19 "100K" RESC0805(2012)_L 66.548,147.955 r0 bottom
R20 "100.00 Ohm" RESC0805(2012)_M 58.547,188.849 r0 bottom
R21 "100.00 Ohm" RESC0805(2012)_M 58.547,179.832 r0 bottom
R22 "100.00 Ohm" RESC0805(2012)_M 58.547,170.434 r0 bottom
R23 "100.00 Ohm" RESC0805(2012)_M 58.547,161.29 r0 bottom
R24 "100.00 Ohm" RESC0805(2012)_M 58.547,152.019 r0 bottom
R25 "330.00 Ohm" RESC0805(2012)_M 78.105,187.071 r180 bottom
R26 "330.00 Ohm" RESC0805(2012)_M 78.105,177.927 r0 bottom
R27 "330.00 Ohm" RESC0805(2012)_M 78.105,168.91 r180 bottom
R28 "330.00 Ohm" RESC0805(2012)_M 78.105,159.766 r0 bottom
R29 "330.00 Ohm" RESC0805(2012)_M 78.105,150.368 r0 bottom
R30 "15000.00 Ohm" RESC0805(2012)_M 141.097,105.156 r0 bottom
R31 "1000.00 Ohm" RESC0805(2012)_M 160.02,111.125 r0 bottom
R32 "1000.00 Ohm" RESC0805(2012)_M 160.147,105.156 r0 bottom
R33 "15000.00 Ohm" RESC0805(2012)_M 153.67,111.125 r180 bottom
R34 "27000.00 Ohm" RESC0805(2012)_M 140.589,111.125 r180 bottom
R35 "22000.00 Ohm" RESC0805(2012)_M 134.366,111.125 r0 bottom
R36 "47000.00 Ohm" RESC0805(2012)_M 130.937,118.237 r0 bottom
R37 "47000.00 Ohm" RESC0805(2012)_M 131.064,124.079 r0 bottom
R38 "15000.00 Ohm" RESC0805(2012)_M 144.145,124.079 r180 bottom
R39 "1000.00 Ohm" RESC0805(2012)_M 149.987,92.456 r0 top
R40 "1000.00 Ohm" RESC0805(2012)_M 159.766,118.237 r0 bottom
R41 "15000.00 Ohm" RESC0805(2012)_M 153.035,124.079 r0 bottom
R42 "27000.00 Ohm" RESC0805(2012)_M 149.733,130.506 r0 bottom
R43 "22000.00 Ohm" RESC0805(2012)_M 141.097,130.506 r0 bottom
R44 "4K7" RESC0805(2012)_M 115.135,218.64 r270 bottom
R45 "330.00 Ohm" RESC0805(2012)_M 123.505,219.78 r270 bottom
R46 "100K" RESC0805(2012)_L 105.41,218.694 r90 bottom
R47 "100K" RESC0805(2012)_L 105.335,212.015 r90 bottom
R48 "100.00 Ohm" RESC0805(2012)_M 89.916,203.962 r0 bottom
S1 "ZXCT1021" SOT95P270X145-5N 128.143,93.345 r270 top
S2 "ZXCT1021" SOT95P270X145-5N 133.096,93.345 r270 top
SD "MICROSD-SPI" MICROSD_WR-CRD 53.467,124.46 r90 top
SNS12 "Socket" PIN1 134.239,97.409 r0 top
SNS33 "Socket" PIN1 126.619,97.409 r0 top
SRAM "CY7C1061AV33" CY7C1061AV33 110.236,119.38 r270 top
U1 "AP7312" SOT95P285X145-6N 142.113,81.28 r0 top
U2 "SR10S3V3" SR10S3V3_Footprint 84.328,96.647 r180 top
U3 "FT232RL-Reel" SSOP-28_N 82.804,117.729 r0 top
USB "MICRO_USB_AB" MICRO_USB_AB 56.261,138.811 r0 top
USB_RESET "BUTTON" BUTTON 74.676,132.08 r180 top
X1 "32.768kHz" MC-306 133.35,159.004 r90 top
X2 "TXC-7B" TXC-7B 133.731,143.51 r180 top

## Footprints (in the part's own frame and the unit in brackets; to place one, negate y for a bottom-side part, rotate by r counter-clockwise, add the part's x,y. Pads: shape width x height; smd on the part's side, far side on the other; paste and mask are expansions set on the pad)
BUTTON [mm]
  rect 1.4x2.1 smd: 1(0,0) 2(0,-9.1) 3(-4.5,-9.1) 4(-4.5,0)
  silkscreen extent -5.3,-7.7 0.8,-1.3
CAP470uF [mm]
  rect 1.8x4 smd: 1(0,8.1) 2(0,0)
  silkscreen extent -5.21,-2.35 5.19,10.33
CAPC0805(2012)75_L [mm] "Chip Capacitor, Body 2.0x1.2mm, Height 0.75mm, IPC High Density"
  rect 0.95x1.35 smd: 1(-0.8,0) 2(0.8,0)
  silkscreen extent -0.05,-0.58 0.05,0.58, body extent -1.1,-0.72 1.1,0.72, height 0.75
CAPC0805(2012)75_M [mm] "Chip Capacitor, Body 2.0x1.2mm, Height 0.75mm, IPC Low Density"
  rect 1.35x1.55 smd: 1(-1,0) 2(1,0)
  silkscreen extent -0.05,-0.67 0.05,0.67, body extent -1.1,-0.72 1.1,0.72, height 0.75
CAPC0805(2012)75_N [mm] "Chip Capacitor, Body 2.0x1.2mm, Height 0.75mm, IPC Medium Density"
  rect 1.15x1.45 smd: 1(-0.9,0) 2(0.9,0)
  silkscreen extent -0.05,-0.62 0.05,0.62, body extent -1.1,-0.72 1.1,0.73, height 0.75
CAPC0805(2012)100_M [mm] "Chip Capacitor, Body 2.0x1.2mm, Height 1.0mm, IPC Low Density"
  rect 1.35x1.55 smd: 1(-1,0) 2(1,0)
  silkscreen extent -0.05,-0.67 0.05,0.67, body extent -1.1,-0.72 1.1,0.72, height 1
CAPC0805(2012)100_N [mm] "Chip Capacitor, Body 2.0x1.2mm, Height 1.0mm, IPC Medium Density"
  rect 1.15x1.45 smd: 1(-0.9,0) 2(0.9,0)
  silkscreen extent -0.05,-0.62 0.05,0.62, body extent -1.1,-0.72 1.1,0.73, height 1
CAPC0805(2012)145_L [mm] "Chip Capacitor, Body 2.0x1.2mm, Height 1.45mm, IPC High Density"
  rect 0.95x1.35 smd: 1(-0.8,0) 2(0.8,0)
  silkscreen extent -0.05,-0.58 0.05,0.58, body extent -1.1,-0.72 1.1,0.72, height 1.45
CAPC0805(2012)145_N [mm] "Chip Capacitor, Body 2.0x1.2mm, Height 1.45mm, IPC Medium Density"
  rect 1.15x1.45 smd: 1(-0.9,0) 2(0.9,0)
  silkscreen extent -0.05,-0.62 0.05,0.62, body extent -1.1,-0.72 1.1,0.73, height 1.45
CAPC1210(3225)280A_M [mm] "Chip Capacitor, Body 3.2x2.5mm, Height 2.8mm, IPC Low Density"
  rect 1.6x2.8 smd: 1(-1.475,0) 2(1.475,0)
  silkscreen extent -0.3,-1.3 0.3,1.3, body extent -1.7,-1.4 1.7,1.4, height 2.8
"Coil DRA74-6R8-R" [mm]
  rect 2.5x3.25 smd: 1(0,0) 2(6,0)
  silkscreen extent -1.5,-4.1 7.6,4
CSG324 [mm] "BGA, 324-Leads, Body 15x15mm, Pitch 0.8mm"
  round 0.36 smd: A1(-6.8,6.8) A2(-6,6.8) A3(-5.2,6.8) A4(-4.4,6.8) A5(-3.6,6.8) A6(-2.8,6.8) A7(-2,6.8) A8(-1.2,6.8) A9(-0.4,6.8) A10(0.4,6.8) A11(1.2,6.8) A12(2,6.8) A13(2.8,6.8) A14(3.6,6.8) A15(4.4,6.8) A16(5.2,6.8) A17(6,6.8) A18(6.8,6.8) B1(-6.8,6) B2(-6,6) B3(-5.2,6) B4(-4.4,6) B5(-3.6,6) B6(-2.8,6) B7(-2,6) B8(-1.2,6) B9(-0.4,6) B10(0.4,6) B11(1.2,6) B12(2,6) B13(2.8,6) B14(3.6,6) B15(4.4,6) B16(5.2,6) B17(6,6) B18(6.8,6) C1(-6.8,5.2) C2(-6,5.2) C3(-5.2,5.2) C4(-4.4,5.2) C5(-3.6,5.2) C6(-2.8,5.2) C7(-2,5.2) C8(-1.2,5.2) C9(-0.4,5.2) C10(0.4,5.2) C11(1.2,5.2) C12(2,5.2) C13(2.8,5.2) C14(3.6,5.2) C15(4.4,5.2) C16(5.2,5.2) C17(6,5.2) C18(6.8,5.2) D1(-6.8,4.4) D2(-6,4.4) D3(-5.2,4.4) D4(-4.4,4.4) D5(-3.6,4.4) D6(-2.8,4.4) D7(-2,4.4) D8(-1.2,4.4) D9(-0.4,4.4) D10(0.4,4.4) D11(1.2,4.4) D12(2,4.4) D13(2.8,4.4) D14(3.6,4.4) D15(4.4,4.4) D16(5.2,4.4) D17(6,4.4) D18(6.8,4.4) E1(-6.8,3.6) E2(-6,3.6) E3(-5.2,3.6) E4(-4.4,3.6) E5(-3.6,3.6) E6(-2.8,3.6) E7(-2,3.6) E8(-1.2,3.6) E9(-0.4,3.6) E10(0.4,3.6) E11(1.2,3.6) E12(2,3.6) E13(2.8,3.6) E14(3.6,3.6) E15(4.4,3.6) E16(5.2,3.6) E17(6,3.6) E18(6.8,3.6) F1(-6.8,2.8) F2(-6,2.8) F3(-5.2,2.8) F4(-4.4,2.8) F5(-3.6,2.8) F6(-2.8,2.8) F7(-2,2.8) F8(-1.2,2.8) F9(-0.4,2.8) F10(0.4,2.8) F11(1.2,2.8) F12(2,2.8) F13(2.8,2.8) F14(3.6,2.8) F15(4.4,2.8) F16(5.2,2.8) F17(6,2.8) F18(6.8,2.8) G1(-6.8,2) G2(-6,2) G3(-5.2,2) G4(-4.4,2) G5(-3.6,2) G6(-2.8,2) G7(-2,2) G8(-1.2,2) G9(-0.4,2) G10(0.4,2) G11(1.2,2) G12(2,2) G13(2.8,2) G14(3.6,2) G15(4.4,2) G16(5.2,2) G17(6,2) G18(6.8,2) H1(-6.8,1.2) H2(-6,1.2) H3(-5.2,1.2) H4(-4.4,1.2) H5(-3.6,1.2) H6(-2.8,1.2) H7(-2,1.2) H8(-1.2,1.2) H9(-0.4,1.2) H10(0.4,1.2) H11(1.2,1.2) H12(2,1.2) H13(2.8,1.2) H14(3.6,1.2) H15(4.4,1.2) H16(5.2,1.2) H17(6,1.2) H18(6.8,1.2) J1(-6.8,0.4) J2(-6,0.4) J3(-5.2,0.4) J4(-4.4,0.4) J5(-3.6,0.4) J6(-2.8,0.4) J7(-2,0.4) J8(-1.2,0.4) J9(-0.4,0.4) J10(0.4,0.4) J11(1.2,0.4) J12(2,0.4) J13(2.8,0.4) J14(3.6,0.4) J15(4.4,0.4) J16(5.2,0.4) J17(6,0.4) J18(6.8,0.4) K1(-6.8,-0.4) K2(-6,-0.4) K3(-5.2,-0.4) K4(-4.4,-0.4) K5(-3.6,-0.4) K6(-2.8,-0.4) K7(-2,-0.4) K8(-1.2,-0.4) K9(-0.4,-0.4) K10(0.4,-0.4) K11(1.2,-0.4) K12(2,-0.4) K13(2.8,-0.4) K14(3.6,-0.4) K15(4.4,-0.4) K16(5.2,-0.4) K17(6,-0.4) K18(6.8,-0.4) L1(-6.8,-1.2) L2(-6,-1.2) L3(-5.2,-1.2) L4(-4.4,-1.2) L5(-3.6,-1.2) L6(-2.8,-1.2) L7(-2,-1.2) L8(-1.2,-1.2) L9(-0.4,-1.2) L10(0.4,-1.2) L11(1.2,-1.2) L12(2,-1.2) L13(2.8,-1.2) L14(3.6,-1.2) L15(4.4,-1.2) L16(5.2,-1.2) L17(6,-1.2) L18(6.8,-1.2) M1(-6.8,-2) M2(-6,-2) M3(-5.2,-2) M4(-4.4,-2) M5(-3.6,-2) M6(-2.8,-2) M7(-2,-2) M8(-1.2,-2) M9(-0.4,-2) M10(0.4,-2) M11(1.2,-2) M12(2,-2) M13(2.8,-2) M14(3.6,-2) M15(4.4,-2) M16(5.2,-2) M17(6,-2) M18(6.8,-2) N1(-6.8,-2.8) N2(-6,-2.8) N3(-5.2,-2.8) N4(-4.4,-2.8) N5(-3.6,-2.8) N6(-2.8,-2.8) N7(-2,-2.8) N8(-1.2,-2.8) N9(-0.4,-2.8) N10(0.4,-2.8) N11(1.2,-2.8) N12(2,-2.8) N13(2.8,-2.8) N14(3.6,-2.8) N15(4.4,-2.8) N16(5.2,-2.8) N17(6,-2.8) N18(6.8,-2.8) P1(-6.8,-3.6) P2(-6,-3.6) P3(-5.2,-3.6) P4(-4.4,-3.6) P5(-3.6,-3.6) P6(-2.8,-3.6) P7(-2,-3.6) P8(-1.2,-3.6) P9(-0.4,-3.6) P10(0.4,-3.6) P11(1.2,-3.6) P12(2,-3.6) P13(2.8,-3.6) P14(3.6,-3.6) P15(4.4,-3.6) P16(5.2,-3.6) P17(6,-3.6) P18(6.8,-3.6) R1(-6.8,-4.4) R2(-6,-4.4) R3(-5.2,-4.4) R4(-4.4,-4.4) R5(-3.6,-4.4) R6(-2.8,-4.4) R7(-2,-4.4) R8(-1.2,-4.4) R9(-0.4,-4.4) R10(0.4,-4.4) R11(1.2,-4.4) R12(2,-4.4) R13(2.8,-4.4) R14(3.6,-4.4) R15(4.4,-4.4) R16(5.2,-4.4) R17(6,-4.4) R18(6.8,-4.4) T1(-6.8,-5.2) T2(-6,-5.2) T3(-5.2,-5.2) T4(-4.4,-5.2) T5(-3.6,-5.2) T6(-2.8,-5.2) T7(-2,-5.2) T8(-1.2,-5.2) T9(-0.4,-5.2) T10(0.4,-5.2) T11(1.2,-5.2) T12(2,-5.2) T13(2.8,-5.2) T14(3.6,-5.2) T15(4.4,-5.2) T16(5.2,-5.2) T17(6,-5.2) T18(6.8,-5.2) U1(-6.8,-6) U2(-6,-6) U3(-5.2,-6) U4(-4.4,-6) U5(-3.6,-6) U6(-2.8,-6) U7(-2,-6) U8(-1.2,-6) U9(-0.4,-6) U10(0.4,-6) U11(1.2,-6) U12(2,-6) U13(2.8,-6) U14(3.6,-6) U15(4.4,-6) U16(5.2,-6) U17(6,-6) U18(6.8,-6) V1(-6.8,-6.8) V2(-6,-6.8) V3(-5.2,-6.8) V4(-4.4,-6.8) V5(-3.6,-6.8) V6(-2.8,-6.8) V7(-2,-6.8) V8(-1.2,-6.8) V9(-0.4,-6.8) V10(0.4,-6.8) V11(1.2,-6.8) V12(2,-6.8) V13(2.8,-6.8) V14(3.6,-6.8) V15(4.4,-6.8) V16(5.2,-6.8) V17(6,-6.8) V18(6.8,-6.8)
  silkscreen extent -8.27,-7.5 7.5,7.5, body extent -7.5,-7.5 7.5,7.5, height 1.5
CY7C1061AV33 [mm] "TSOP, 54-Leads, Body 22,41x10,16mm, Pitch 0,80mm, IPC Medium Density"
  oval 1.45x0.5 smd: 1(-5.65,10.4) 2(-5.65,9.6) 3(-5.65,8.8) 4(-5.65,8) 5(-5.65,7.2) 6(-5.65,6.4) 7(-5.65,5.6) 8(-5.65,4.8) 9(-5.65,4) 10(-5.65,3.2) 11(-5.65,2.4) 12(-5.65,1.6) 13(-5.65,0.8) 14(-5.65,0) 15(-5.65,-0.8) 16(-5.65,-1.6) 17(-5.65,-2.4) 18(-5.65,-3.2) 19(-5.65,-4) 20(-5.65,-4.8) 21(-5.65,-5.6) 22(-5.65,-6.4) 23(-5.65,-7.2) 24(-5.65,-8) 25(-5.65,-8.8) 26(-5.65,-9.6) 27(-5.65,-10.4) 28(5.65,-10.4) 29(5.65,-9.6) 30(5.65,-8.8) 31(5.65,-8) 32(5.65,-7.2) 33(5.65,-6.4) 34(5.65,-5.6) 35(5.65,-4.8) 36(5.65,-4) 37(5.65,-3.2) 38(5.65,-2.4) 39(5.65,-1.6) 40(5.65,-0.8) 41(5.65,0) 42(5.65,0.8) 43(5.65,1.6) 44(5.65,2.4) 45(5.65,3.2) 46(5.65,4) 47(5.65,4.8) 48(5.65,5.6) 49(5.65,6.4) 50(5.65,7.2) 51(5.65,8) 52(5.65,8.8) 53(5.65,9.6) 54(5.65,10.4)
  silkscreen extent -5.77,-11.25 4.53,11.33, body extent -5.15,-11.25 5.15,11.25, height 1.2
DC-10B [mil]
  oval 60x170 hole 30 slot 140 at 90 deg: 1(244.09,0)
  oval 160x60 hole 30 slot 130 at 0 deg: 2(122.05,-196.85)
  oval 60x160 hole 30 slot 130 at 90 deg: 3(0,0)
  silkscreen extent -295,-200 245,197
ENMR-BGA112 [mm] "BGA, 112-Balls, Body 10x10mm, Pitch 0.8mm"
  round 0.45 smd: A1(-4,4) A2(-3.2,4) A3(-2.4,4) A4(-1.6,4) A5(-0.8,4) A6(0,4) A7(0.8,4) A8(1.6,4) A9(2.4,4) A10(3.2,4) A11(4,4) B1(-4,3.2) B2(-3.2,3.2) B3(-2.4,3.2) B4(-1.6,3.2) B5(-0.8,3.2) B6(0,3.2) B7(0.8,3.2) B8(1.6,3.2) B9(2.4,3.2) B10(3.2,3.2) B11(4,3.2) C1(-4,2.4) C2(-3.2,2.4) C3(-2.4,2.4) C4(-1.6,2.4) C5(-0.8,2.4) C6(0,2.4) C7(0.8,2.4) C8(1.6,2.4) C9(2.4,2.4) C10(3.2,2.4) C11(4,2.4) D1(-4,1.6) D2(-3.2,1.6) D3(-2.4,1.6) D4(-1.6,1.6) D5(-0.8,1.6) D6(0,1.6) D7(0.8,1.6) D8(1.6,1.6) D9(2.4,1.6) D10(3.2,1.6) D11(4,1.6) E1(-4,0.8) E2(-3.2,0.8) E3(-2.4,0.8) E4(-1.6,0.8) E5(-0.8,0.8) E6(0,0.8) E7(0.8,0.8) E8(1.6,0.8) E9(2.4,0.8) E10(3.2,0.8) E11(4,0.8) F1(-4,0) F2(-3.2,0) F3(-2.4,0) F4(-1.6,0) F5(-0.8,0) F6(0,0) F7(0.8,0) F8(1.6,0) F9(2.4,0) F10(3.2,0) F11(4,0) G1(-4,-0.8) G2(-3.2,-0.8) G3(-2.4,-0.8) G4(-1.6,-0.8) G5(-0.8,-0.8) G6(0,-0.8) G7(0.8,-0.8) G8(1.6,-0.8) G9(2.4,-0.8) G10(3.2,-0.8) G11(4,-0.8) H1(-4,-1.6) H2(-3.2,-1.6) H3(-2.4,-1.6) H4(-1.6,-1.6) H5(-0.8,-1.6) H6(0,-1.6) H7(0.8,-1.6) H8(1.6,-1.6) H9(2.4,-1.6) H10(3.2,-1.6) H11(4,-1.6) J1(-4,-2.4) J2(-3.2,-2.4) J3(-2.4,-2.4) J4(-1.6,-2.4) J5(-0.8,-2.4) J6(0,-2.4) J7(0.8,-2.4) J8(1.6,-2.4) J9(2.4,-2.4) J10(3.2,-2.4) J11(4,-2.4) K1(-4,-3.2) K2(-3.2,-3.2) K3(-2.4,-3.2) K4(-1.6,-3.2) K5(-0.8,-3.2) K6(0,-3.2) K7(0.8,-3.2) K8(1.6,-3.2) K9(2.4,-3.2) K10(3.2,-3.2) K11(4,-3.2) L1(-4,-4) L2(-3.2,-4) L3(-2.4,-4) L4(-1.6,-4) L5(-0.8,-4) L6(0,-4) L7(0.8,-4) L8(1.6,-4) L9(2.4,-4) L10(3.2,-4) L11(4,-4)
  silkscreen extent -5.77,-5 5,5, body extent -5,-5 5,5, height 1.3
FPGA_FLASH [mm] "TSSOP, 48-Leads, Body 12,00x18,45mm, Pitch 0,50mm, IPC Medium Density"
  rect 1.7x0.2 smd: 1(-9.6,5.75) 2(-9.6,5.25) 3(-9.6,4.75) 4(-9.6,4.25) 5(-9.6,3.75) 6(-9.6,3.25) 7(-9.6,2.75) 8(-9.6,2.25) 9(-9.6,1.75) 10(-9.6,1.25) 11(-9.6,0.75) 12(-9.6,0.25) 13(-9.6,-0.25) 14(-9.6,-0.75) 15(-9.6,-1.25) 16(-9.6,-1.75) 17(-9.6,-2.25) 18(-9.6,-2.75) 19(-9.6,-3.25) 20(-9.6,-3.75) 21(-9.6,-4.25) 22(-9.6,-4.75) 23(-9.6,-5.25) 24(-9.6,-5.75) 25(9.6,-5.75) 26(9.6,-5.25) 27(9.6,-4.75) 28(9.6,-4.25) 29(9.6,-3.75) 30(9.6,-3.25) 31(9.6,-2.75) 32(9.6,-2.25) 33(9.6,-1.75) 34(9.6,-1.25) 35(9.6,-0.75) 36(9.6,-0.25) 37(9.6,0.25) 38(9.6,0.75) 39(9.6,1.25) 40(9.6,1.75) 41(9.6,2.25) 42(9.6,2.75) 43(9.6,3.25) 44(9.6,3.75) 45(9.6,4.25) 46(9.6,4.75) 47(9.6,5.25) 48(9.6,5.75)
  silkscreen extent -9.73,-6.05 8.35,6.52, body extent -9.25,-6.05 9.25,6.05, height 1.05
HDR1X2 [mm] "Connector; Header; 2 Position"
  rect 1.5x1.5 hole 0.9: 1(0,0)
  round 1.5 hole 0.9: 2(2.54,0)
  silkscreen extent -1.27,-1.27 3.81,1.27
HDR1X3 [mm] "Connector; Header; 3 Position"
  rect 1.5x1.5 hole 0.9: 1(0,0)
  round 1.5 hole 0.9: 2(2.54,0) 3(5.08,0)
  silkscreen extent -1.27,-1.27 6.35,1.27
HDR2X5 [mm] "Connector; Header; 5x2 Position"
  rect 1.5x1.5 hole 0.9: 1(0,0)
  round 1.5 hole 0.9: 2(0,2.54) 3(2.54,0) 4(2.54,2.54) 5(5.08,0) 6(5.08,2.54) 7(7.62,0) 8(7.62,2.54) 9(10.16,0) 10(10.16,2.54)
  silkscreen extent -1.27,-1.27 11.43,3.81
HDR2X6 [mm] "Connector; Header; 6x2 Position"
  rect 1.5x1.5 hole 0.9: 1(0,0)
  round 1.5 hole 0.9: 2(0,2.54) 3(2.54,0) 4(2.54,2.54) 5(5.08,0) 6(5.08,2.54) 7(7.62,0) 8(7.62,2.54) 9(10.16,0) 10(10.16,2.54) 11(12.7,0) 12(12.7,2.54)
  silkscreen extent -1.27,-1.27 13.97,3.81
HDR2X7 [mm] "Connector; Header; 7x2 Position"
  rect 1.5x1.5 hole 0.9: 1(0,0)
  round 1.5 hole 0.9: 2(0,2.54) 3(2.54,0) 4(2.54,2.54) 5(5.08,0) 6(5.08,2.54) 7(7.62,0) 8(7.62,2.54) 9(10.16,0) 10(10.16,2.54) 11(12.7,0) 12(12.7,2.54) 13(15.24,0) 14(15.24,2.54)
  silkscreen extent -1.27,-1.27 16.51,3.81
HDR2X10 [mm] "Connector; Header; 10x2 Position"
  rect 1.5x1.5 hole 0.9: 1(0,0)
  round 1.5 hole 0.9: 2(0,2.54) 3(2.54,0) 4(2.54,2.54) 5(5.08,0) 6(5.08,2.54) 7(7.62,0) 8(7.62,2.54) 9(10.16,0) 10(10.16,2.54) 11(12.7,0) 12(12.7,2.54) 13(15.24,0) 14(15.24,2.54) 15(17.78,0) 16(17.78,2.54) 17(20.32,0) 18(20.32,2.54) 19(22.86,0) 20(22.86,2.54)
  silkscreen extent -1.27,-1.27 24.13,3.81
INDC3216 [mm] "Chip Inductor, Body 3.2x1.6mm, IPC High Density"
  rect 1.1x1.8 smd: 1(-1.35,0) 2(1.35,0)
  silkscreen extent -0.4,-0.8 0.4,0.8, body extent -1.7,-0.9 1.7,0.9, height 0.55
LED-0805-A [mil]
  round 20 on Mech14: 0(0,0)
  rrect25% 50x50 smd: A(-37.5,0) K(37.5,0)
  Top Layer pour cut-out: -15,30 15,30 15,-30 -15,-30
  silkscreen extent -72,-35 77,35, body extent -39,-25 39,25, height 31
LED-0805-K [mil]
  round 20 on Mech14: 0(0,0)
  rrect25% 50x50 smd: A(-37.5,0) K(37.5,0)
  Top Layer pour cut-out: -15,30 15,30 15,-30 -15,-30
  silkscreen extent -72,-35 77,35, body extent -39,-25 39,25, height 31
MC-306 [mm]
  rect 1.3x1.9 smd: 1(0,0) 2(5.5,0) 3(5.5,3.2) 4(0,3.2)
  silkscreen extent -0.92,-1.27 6.46,4.41
MICRO_USB_AB [mm] "Molex, Micro USB type AB 47589-0001"
  rect 1.35x0.4 smd: 1(-0.05,-0.925) 2(-0.05,-1.575) 3(-0.05,-2.225) 4(-0.05,-2.875) 5(-0.05,-3.525)
  rrect50% 1.9x2.1 hole 0.83 slot 1.5 at 0 deg unplated copper offset 0,0.435: ""(-3.18,-6.31)
  rrect50% 1.9x2.1 hole 0.83 slot 1.5 at 0 deg unplated copper offset 0,-0.435: ""(-3.18,1.86)
  rect 1.9x1.8 smd: ""(-3,-3.375) ""(-3,-1.075)
  oval 0.95x0.85 hole 0.75 slot 0.85 at 0 deg unplated: ""(0,-4.45) ""(0,0)
  silkscreen extent -4.98,-8.55 2.01,3.62
MICROSD_WR-CRD [mm] "Micro SD from Würth Electronics, WR-CRD"
  rect 0.8x1.5 smd: 1(-3.6,-9.55) 2(-4.7,-9.55) 3(-5.8,-9.55) 4(-6.9,-9.55) 5(-8,-9.55) 6(-9.1,-9.55) 7(-10.2,-9.55) 8(-11.3,-9.55)
  rect 1.45x2 smd: ""(-13.75,-12.15) ""(-13.75,-3.85) ""(0,-3.85) ""(0,-12.15)
  silkscreen extent -16.3,-17.25 2.05,1.3
MINIJACKS [mm]
  rect 1.5x1.5 smd: 1(0,0) 3(8.1,0)
  rect 1.5x2 smd: 2(0,8.85) 2(8.1,8.8)
  silkscreen extent -0.9,1.1 9,9.97
PIN1 [mm] "Connector; Plug"
  rect 1.5x1.5 hole 0.9: 1(0,0)
  silkscreen extent -1.4,-1.4 1.4,2.17
RESC0805(2012)_L [mm] "Chip Resistor, Body 2.0x1.3mm, IPC High Density"
  rect 0.85x1.3 smd: 1(-0.85,0) 2(0.85,0)
  silkscreen extent -0.05,-0.55 0.05,0.55, body extent -1.1,-0.67 1.1,0.68, height 0.7
RESC0805(2012)_M [mm] "Chip Resistor, Body 2.0x1.3mm, IPC Low Density"
  rect 1.25x1.5 smd: 1(-1.05,0) 2(1.05,0)
  silkscreen extent -0.05,-0.65 0.05,0.65, body extent -1.1,-0.67 1.1,0.67, height 0.7
RESC3216N [mm] "Chip Resistor, Body 3.2x1.6mm, 1206, IPC Medium Density"
  round 0.508 on Mech14: 0(0,0)
  rrect25% 1.3x1.8 smd: 1(-1.45,0) 2(1.45,0)
  silkscreen extent -0.51,-0.89 0.51,0.89, body extent -1.62,-0.82 1.63,0.83, height 0.69
SOT95P270X145-5N [mm] "SOT23, 5-Leads, Body 2,90x2,70mm, Pitch 0,95mm, IPC Medium Density"
  rect 1.1x0.6 smd: 1(-1.2,0.95) 2(-1.2,0) 3(-1.2,-0.95) 4(1.2,-0.95) 5(1.2,0.95)
  silkscreen extent -1.32,-1.55 0.25,1.93, body extent -0.9,-1.55 0.9,1.55, height 1.45
SOT95P285X145-6N [mm] "SOT23, 6-Leads, Body 3,00x2,85mm, Pitch 0,95mm, IPC Medium Density"
  rect 1.05x0.6 smd: 1(-1.225,0.95) 2(-1.225,0) 3(-1.225,-0.95) 4(1.225,-0.95) 5(1.225,0) 6(1.225,0.95)
  silkscreen extent -1.35,-1.55 0.3,1.92, body extent -0.85,-1.55 0.85,1.55, height 1.45
SR10S3V3_Footprint [mm]
  round 1.5 hole 0.9: 1(5.08,0) 2(2.54,0) 3(0,0)
  silkscreen extent -3.5,-6.06 8.21,2.01
SSOP-28_N [mm] "SOP, 28-Leads, Body 10.2x5.3mm, Pitch 0.65mm, IPC Medium Density"
  oval 2.1x0.35 smd: 1(-3.45,4.225) 2(-3.45,3.575) 3(-3.45,2.925) 4(-3.45,2.275) 5(-3.45,1.625) 6(-3.45,0.975) 7(-3.45,0.325) 8(-3.45,-0.325) 9(-3.45,-0.975) 10(-3.45,-1.625) 11(-3.45,-2.275) 12(-3.45,-2.925) 13(-3.45,-3.575) 14(-3.45,-4.225) 15(3.45,-4.225) 16(3.45,-3.575) 17(3.45,-2.925) 18(3.45,-2.275) 19(3.45,-1.625) 20(3.45,-0.975) 21(3.45,-0.325) 22(3.45,0.325) 23(3.45,0.975) 24(3.45,1.625) 25(3.45,2.275) 26(3.45,2.925) 27(3.45,3.575) 28(3.45,4.225)
  silkscreen extent -3.57,-5.25 2,5.25, body extent -2.8,-5.25 2.8,5.25, height 2
TLV2471IDBVT [mm] "SOT23, 5-Leads, Body 2,90x2,80mm, Pitch 0,95mm, IPC Medium Density"
  rect 1.1x0.6 smd: 1(-1.2,0.95) 2(-1.2,0) 3(-1.2,-0.95) 4(1.2,-0.95) 5(1.2,0.95)
  silkscreen extent -1.32,-1.55 0.25,1.92, body extent -0.87,-1.52 0.87,1.53, height 1.45
TXC-7B [mm]
  rect 2x1.2 smd: 1(0,0) 2(3.7,0) 3(3.7,2.2) 4(0,2.2)
  silkscreen extent -1.28,-0.87 4.98,3.09
TXC-7W [mm]
  rect 1.8x2 smd: 1(0,0) 2(5.08,0) 3(5.08,4.2) 4(0,4.2)
  silkscreen extent -1.22,-1.37 6.3,5.57